# EAGLE board SparkFun_dToF-TMF8820-Panel (EAGLE 9.6.2), part 1 of 4
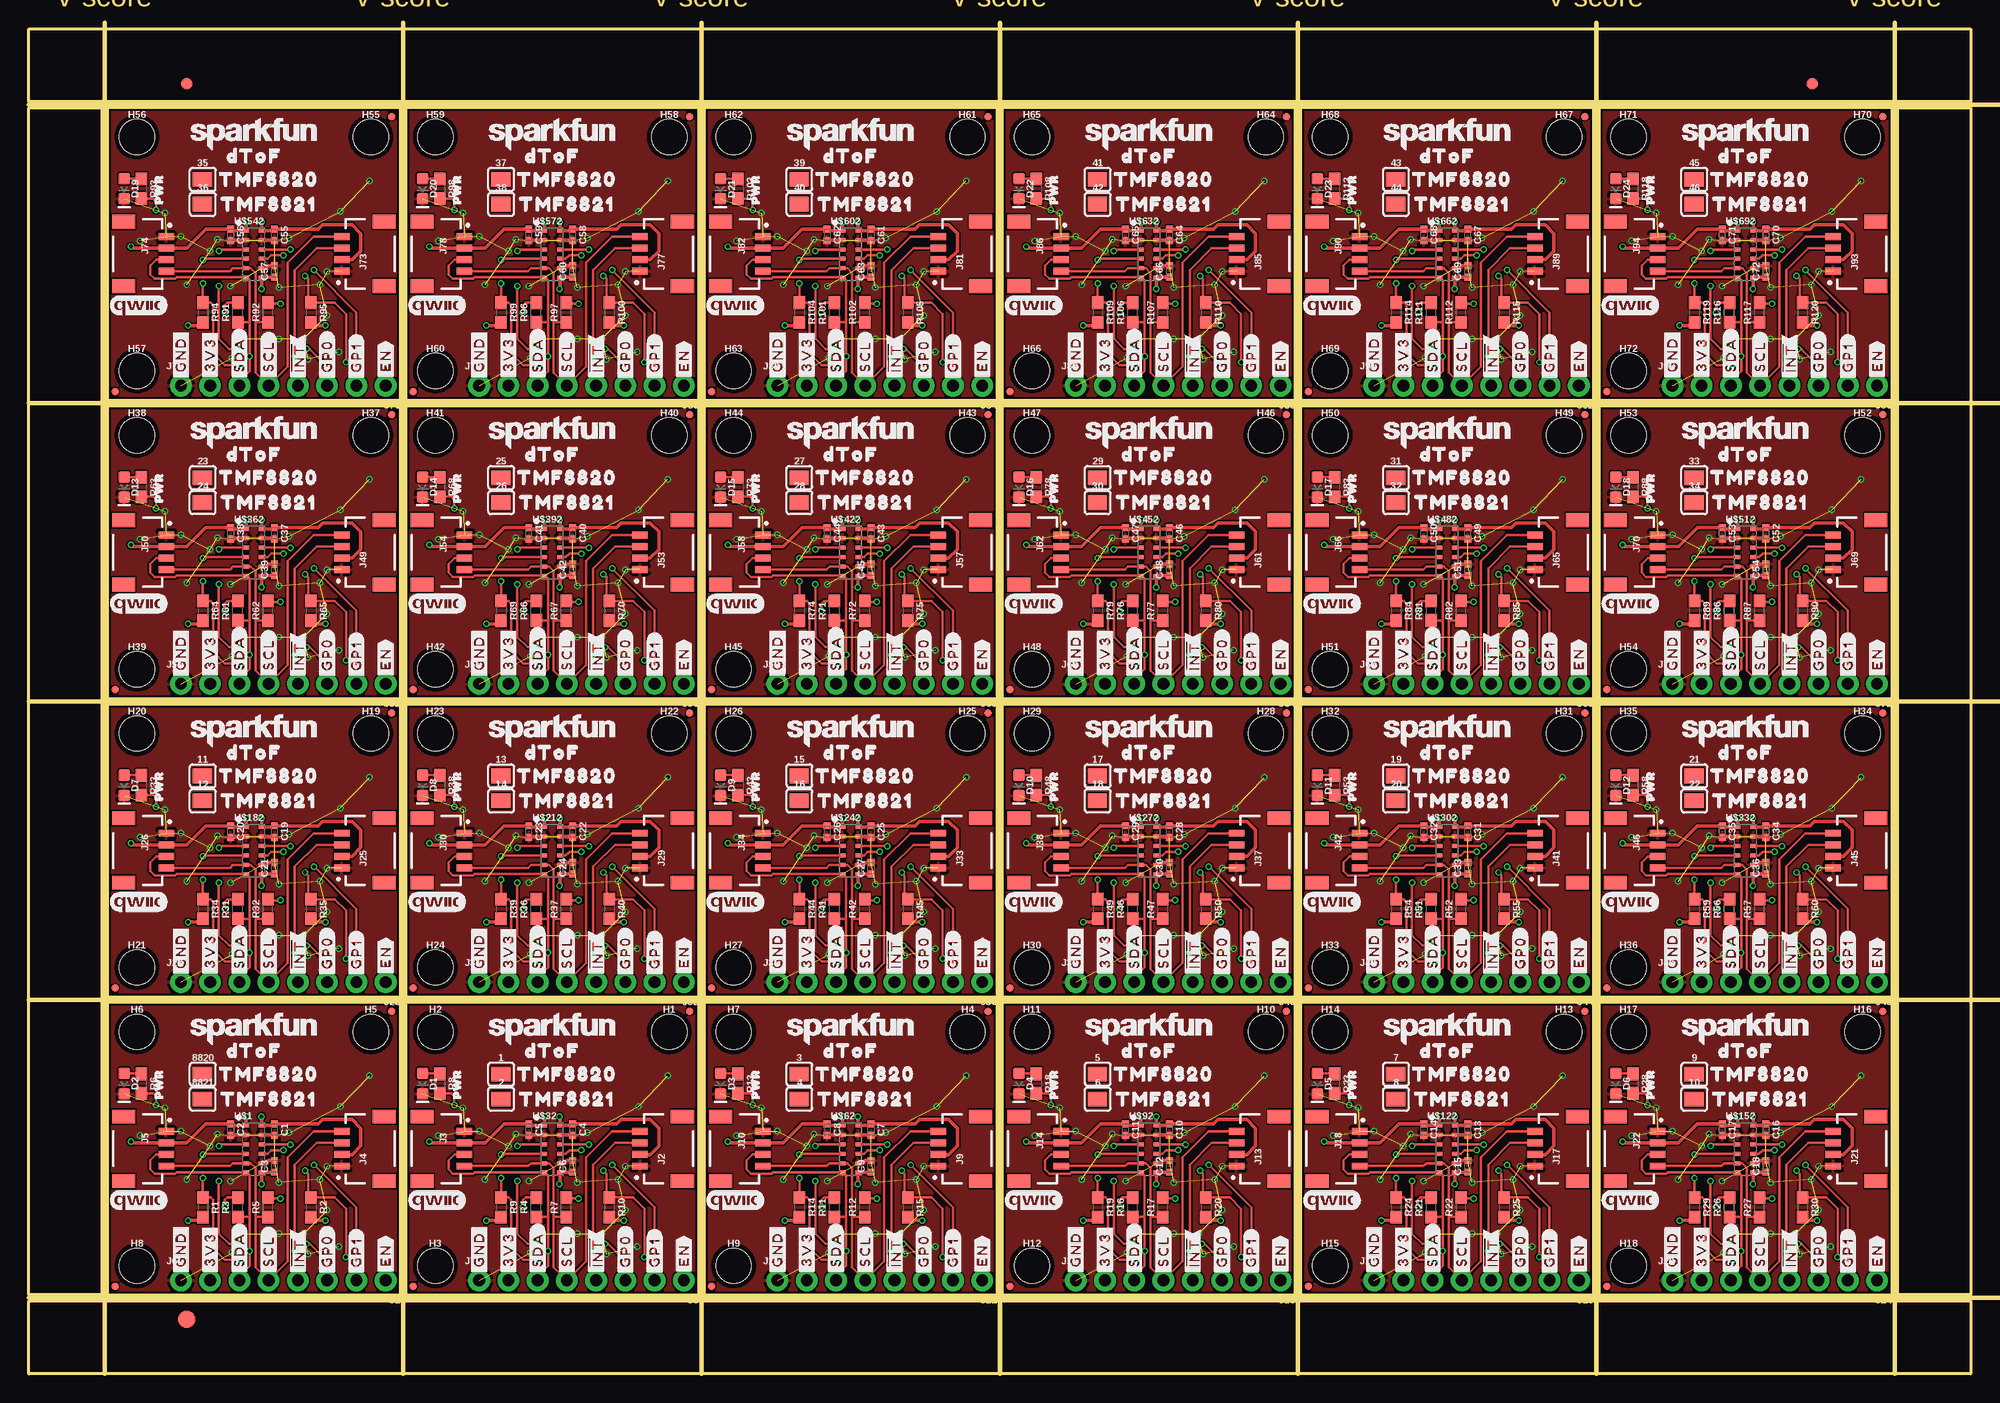
[diagram p0: board, top side]
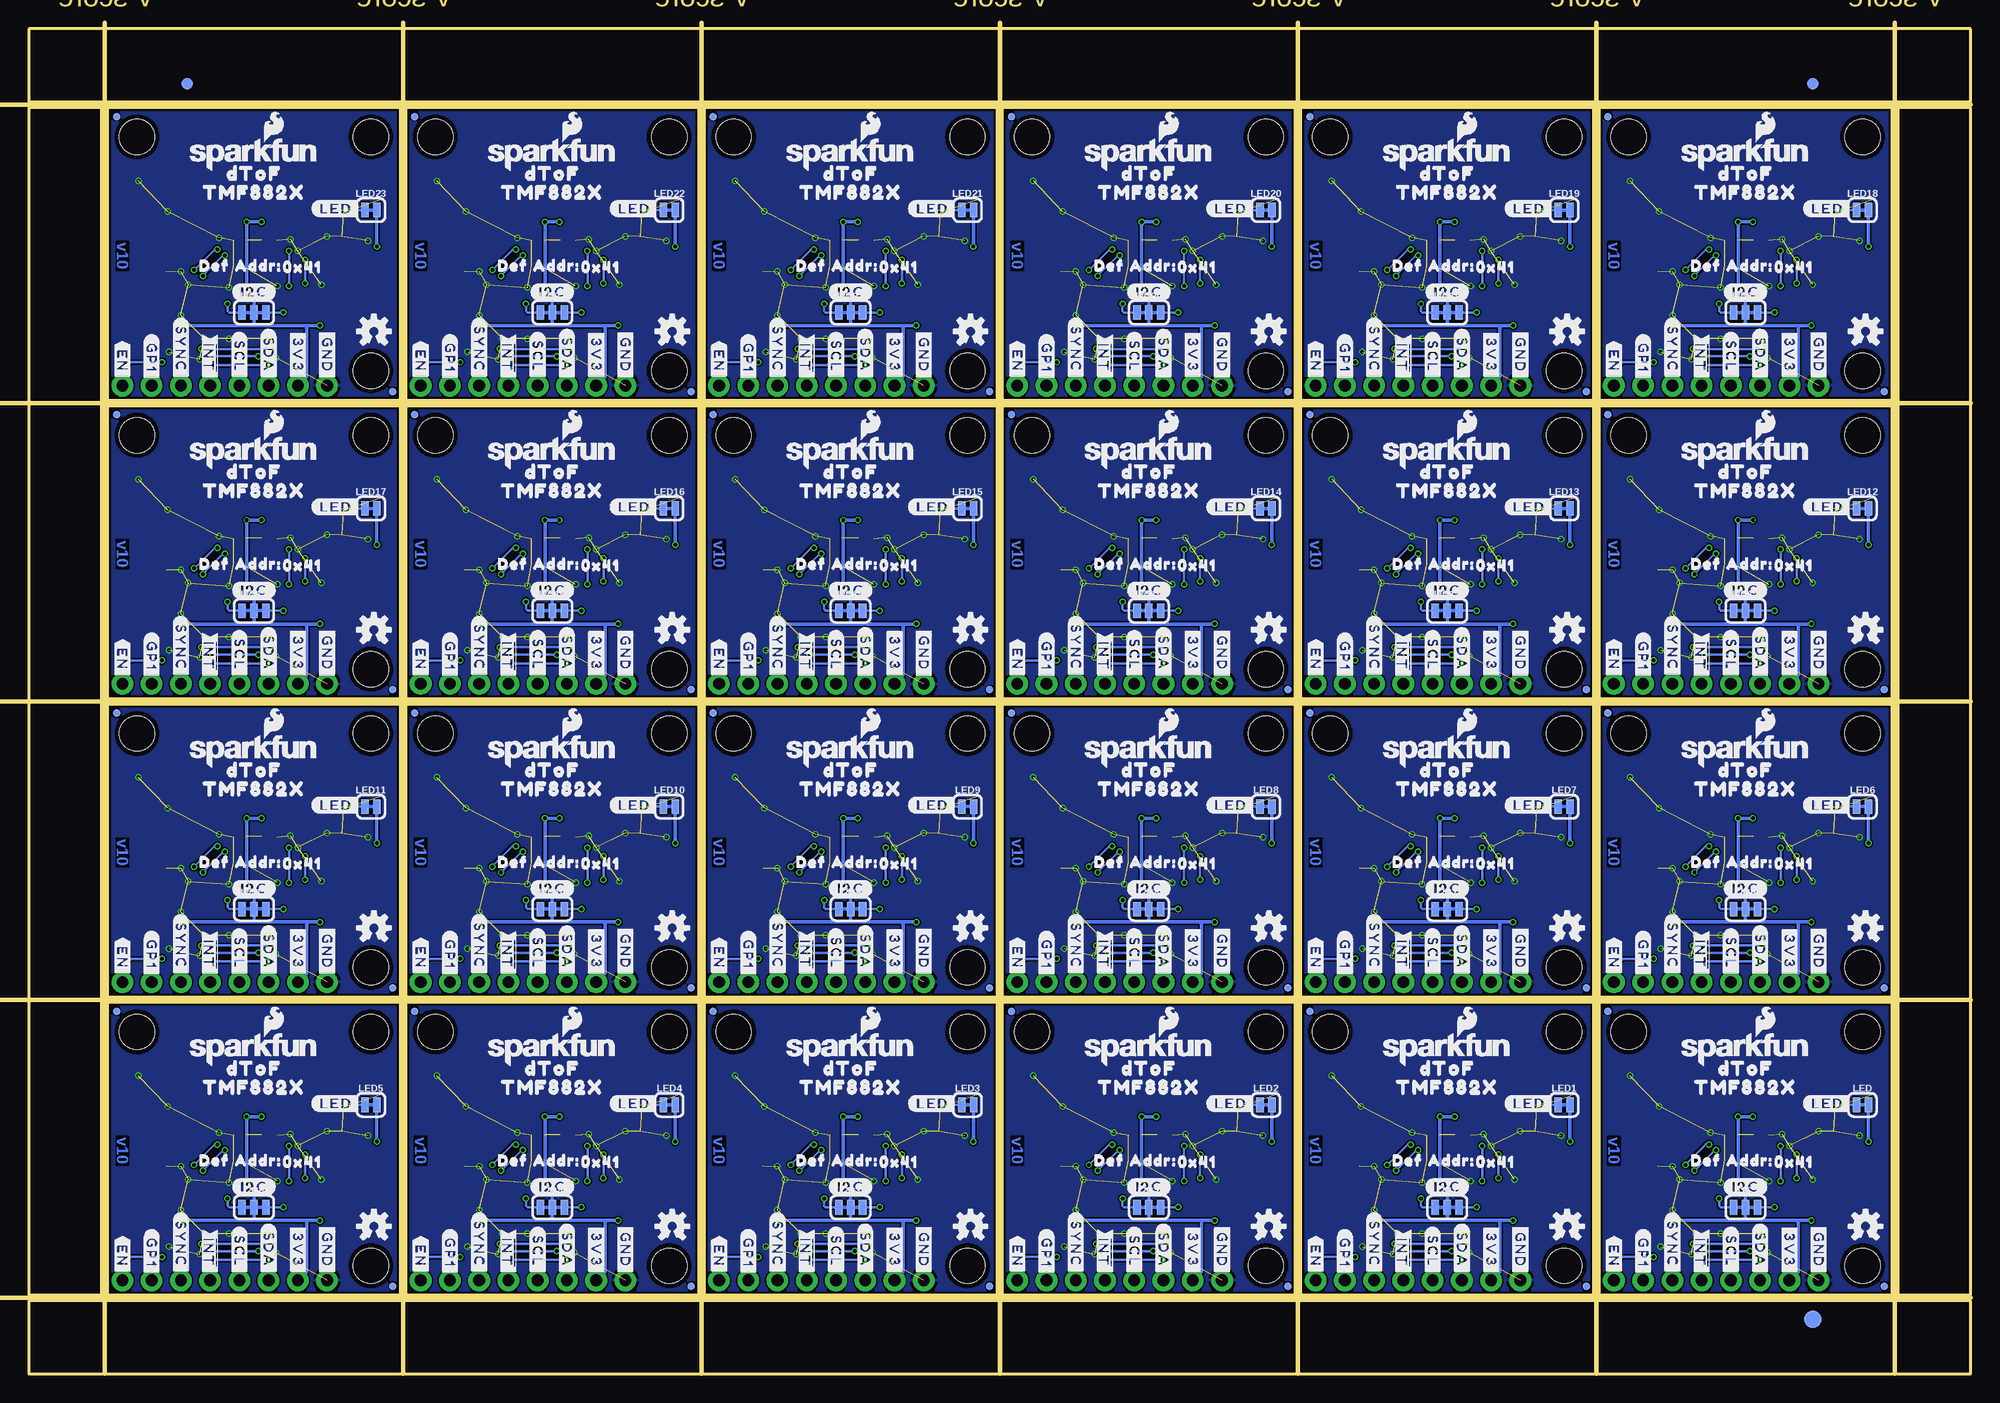
[diagram p1: board, bottom side, seen from below]

Size 168.66 x 116.84 mm. Coordinates in mm from the lower left corner, seen from the top.
Outline: 6.86,6.86 6.86,32.26 32.26,32.26 32.26,6.86 6.86,6.86
Outline: 32.77,6.86 32.77,32.26 58.17,32.26 58.17,6.86 32.77,6.86
Outline: 58.67,6.86 58.67,32.26 84.07,32.26 84.07,6.86 58.67,6.86
Outline: 84.58,6.86 84.58,32.26 109.98,32.26 109.98,6.86 84.58,6.86
Outline: 110.49,6.86 110.49,32.26 135.89,32.26 135.89,6.86 110.49,6.86
Outline: 136.4,6.86 136.4,32.26 161.8,32.26 161.8,6.86 136.4,6.86
Outline: 6.86,32.77 6.86,58.17 32.26,58.17 32.26,32.77 6.86,32.77
Outline: 32.77,32.77 32.77,58.17 58.17,58.17 58.17,32.77 32.77,32.77
Outline: 58.67,32.77 58.67,58.17 84.07,58.17 84.07,32.77 58.67,32.77
Outline: 84.58,32.77 84.58,58.17 109.98,58.17 109.98,32.77 84.58,32.77
Outline: 110.49,32.77 110.49,58.17 135.89,58.17 135.89,32.77 110.49,32.77
Outline: 136.4,32.77 136.4,58.17 161.8,58.17 161.8,32.77 136.4,32.77
Outline: 6.86,58.67 6.86,84.07 32.26,84.07 32.26,58.67 6.86,58.67
Outline: 32.77,58.67 32.77,84.07 58.17,84.07 58.17,58.67 32.77,58.67
Outline: 58.67,58.67 58.67,84.07 84.07,84.07 84.07,58.67 58.67,58.67
Outline: 84.58,58.67 84.58,84.07 109.98,84.07 109.98,58.67 84.58,58.67
Outline: 110.49,58.67 110.49,84.07 135.89,84.07 135.89,58.67 110.49,58.67
Outline: 136.4,58.67 136.4,84.07 161.8,84.07 161.8,58.67 136.4,58.67
Outline: 6.86,84.58 6.86,109.98 32.26,109.98 32.26,84.58 6.86,84.58
Outline: 32.77,84.58 32.77,109.98 58.17,109.98 58.17,84.58 32.77,84.58
Outline: 58.67,84.58 58.67,109.98 84.07,109.98 84.07,84.58 58.67,84.58
Outline: 84.58,84.58 84.58,109.98 109.98,109.98 109.98,84.58 84.58,84.58
Outline: 110.49,84.58 110.49,109.98 135.89,109.98 135.89,84.58 110.49,84.58
Outline: 136.4,84.58 136.4,109.98 161.8,109.98 161.8,84.58 136.4,84.58
Outline: 0,6.35 168.66,6.35 168.66,0 0,0 0,6.35
Outline: 162.31,109.98 168.66,109.98 168.66,6.86 162.31,6.86 162.31,109.98
Outline: 0,116.84 168.66,116.84 168.66,110.49 0,110.49 0,116.84
Outline: 0,109.98 6.35,109.98 6.35,6.86 0,6.86 0,109.98
Copper layers (1*16): Top 0.035mm / dielectric 1.5mm / Bottom 0.035mm
Design rules "SparkFun_tDof-TMF8820": minimum track width 5mil, minimum drill 0.3mm, track to track 5mil, track to pad 5mil, pad to pad 5mil, via to via 5mil, smd to smd 5mil, copper to edge 7mil, drill to drill 7mil, minimum pad ring 5mil, minimum via ring 5mil, stop-mask expansion 2.5mil, vias tented up to drill 25mil, thermal gap 10mil
Milling: 12 lines

## Footprints (pad centres in the part's own frame; a part is rotated, then mirrored left to right if it is on the bottom)
PRODUCT_IDENT_PASTE_SILK = smd 1.676 x 1.27: 1 -0.025,0
PRODUCT_IDENT_NO_SILK = smd 1.676 x 1.27: 1 -0.025,0
0402-TIGHT = smd 0.6 x 0.6: 1 -0.5,0; 2 0.5,0
LED-0603 = smd 1 x 1: A -0.877,0; C 0.877,0
FIDUCIAL-1X2 = smd 1 x 1: 1 0,0
FIDUCIAL-1.5X3 = smd 1.5 x 1.5: 1 0,0
FIDUCIAL-MICRO = smd 0.635 x 0.635: 1 0,0
STAND-OFF-TIGHT = hole 3.048: 0,0
SMT-JUMPER_3_2-NC_TRACE_SILK = smd 0.66 x 1.27: 1 -1.041,0; 2 0,0; 3 1.041,0
1X04_NO_SILK = drill 1.016 pad 1.88: 1 0,0; 2 2.54,0; 3 5.08,0; 4 7.62,0
JST04_1MM_RA = smd 0.6 x 1.35: 1 -1.5,0; 2 -0.5,0; 3 0.5,0; 4 1.5,0 | smd 1.2 x 2: NC1 2.8,-3.675; NC2 -2.8,-3.675
SMT-JUMPER_2_NC_TRACE_SILK = smd 0.66 x 1.27: 1 -0.521,0; 2 0.521,0
0603 = smd 1.1 x 1: 1 -0.85,0; 2 0.85,0
TMF882X = smd 0.5 x 0.35: P1 -0.686,2.032; P2 -0.686,1.212; P3 -0.686,0.392; P4 -0.686,-0.428; P5 -0.686,-1.248; P6 -0.686,-2.068; P7 0.664,-2.068; P8 0.664,-1.248; P9 0.664,-0.428; P10 0.664,0.392; P11 0.664,1.212; P12 0.664,2.032

## Placement (x,y rotation side)
1  PROD_ID_PASTE_SILK  [PRODUCT_IDENT_PASTE_SILK]  41.02,26.04 0 top
2  PROD_ID_NO-PASTE_SILK  [PRODUCT_IDENT_NO_SILK]  41.02,23.88 0 top
3  PROD_ID_PASTE_SILK  [PRODUCT_IDENT_PASTE_SILK]  66.93,26.04 0 top
4  PROD_ID_NO-PASTE_SILK  [PRODUCT_IDENT_NO_SILK]  66.93,23.88 0 top
5  PROD_ID_PASTE_SILK  [PRODUCT_IDENT_PASTE_SILK]  92.84,26.04 0 top
6  PROD_ID_NO-PASTE_SILK  [PRODUCT_IDENT_NO_SILK]  92.84,23.88 0 top
7  PROD_ID_PASTE_SILK  [PRODUCT_IDENT_PASTE_SILK]  118.75,26.04 0 top
8  PROD_ID_NO-PASTE_SILK  [PRODUCT_IDENT_NO_SILK]  118.75,23.88 0 top
9  PROD_ID_PASTE_SILK  [PRODUCT_IDENT_PASTE_SILK]  144.65,26.04 0 top
10  PROD_ID_NO-PASTE_SILK  [PRODUCT_IDENT_NO_SILK]  144.65,23.88 0 top
11  PROD_ID_PASTE_SILK  [PRODUCT_IDENT_PASTE_SILK]  15.11,51.94 0 top
12  PROD_ID_NO-PASTE_SILK  [PRODUCT_IDENT_NO_SILK]  15.11,49.78 0 top
13  PROD_ID_PASTE_SILK  [PRODUCT_IDENT_PASTE_SILK]  41.02,51.94 0 top
14  PROD_ID_NO-PASTE_SILK  [PRODUCT_IDENT_NO_SILK]  41.02,49.78 0 top
15  PROD_ID_PASTE_SILK  [PRODUCT_IDENT_PASTE_SILK]  66.93,51.94 0 top
16  PROD_ID_NO-PASTE_SILK  [PRODUCT_IDENT_NO_SILK]  66.93,49.78 0 top
17  PROD_ID_PASTE_SILK  [PRODUCT_IDENT_PASTE_SILK]  92.84,51.94 0 top
18  PROD_ID_NO-PASTE_SILK  [PRODUCT_IDENT_NO_SILK]  92.84,49.78 0 top
19  PROD_ID_PASTE_SILK  [PRODUCT_IDENT_PASTE_SILK]  118.75,51.94 0 top
20  PROD_ID_NO-PASTE_SILK  [PRODUCT_IDENT_NO_SILK]  118.75,49.78 0 top
21  PROD_ID_PASTE_SILK  [PRODUCT_IDENT_PASTE_SILK]  144.65,51.94 0 top
22  PROD_ID_NO-PASTE_SILK  [PRODUCT_IDENT_NO_SILK]  144.65,49.78 0 top
23  PROD_ID_PASTE_SILK  [PRODUCT_IDENT_PASTE_SILK]  15.11,77.85 0 top
24  PROD_ID_NO-PASTE_SILK  [PRODUCT_IDENT_NO_SILK]  15.11,75.69 0 top
25  PROD_ID_PASTE_SILK  [PRODUCT_IDENT_PASTE_SILK]  41.02,77.85 0 top
26  PROD_ID_NO-PASTE_SILK  [PRODUCT_IDENT_NO_SILK]  41.02,75.69 0 top
27  PROD_ID_PASTE_SILK  [PRODUCT_IDENT_PASTE_SILK]  66.93,77.85 0 top
28  PROD_ID_NO-PASTE_SILK  [PRODUCT_IDENT_NO_SILK]  66.93,75.69 0 top
29  PROD_ID_PASTE_SILK  [PRODUCT_IDENT_PASTE_SILK]  92.84,77.85 0 top
30  PROD_ID_NO-PASTE_SILK  [PRODUCT_IDENT_NO_SILK]  92.84,75.69 0 top
31  PROD_ID_PASTE_SILK  [PRODUCT_IDENT_PASTE_SILK]  118.75,77.85 0 top
32  PROD_ID_NO-PASTE_SILK  [PRODUCT_IDENT_NO_SILK]  118.75,75.69 0 top
33  PROD_ID_PASTE_SILK  [PRODUCT_IDENT_PASTE_SILK]  144.65,77.85 0 top
34  PROD_ID_NO-PASTE_SILK  [PRODUCT_IDENT_NO_SILK]  144.65,75.69 0 top
35  PROD_ID_PASTE_SILK  [PRODUCT_IDENT_PASTE_SILK]  15.11,103.76 0 top
36  PROD_ID_NO-PASTE_SILK  [PRODUCT_IDENT_NO_SILK]  15.11,101.6 0 top
37  PROD_ID_PASTE_SILK  [PRODUCT_IDENT_PASTE_SILK]  41.02,103.76 0 top
38  PROD_ID_NO-PASTE_SILK  [PRODUCT_IDENT_NO_SILK]  41.02,101.6 0 top
39  PROD_ID_PASTE_SILK  [PRODUCT_IDENT_PASTE_SILK]  66.93,103.76 0 top
40  PROD_ID_NO-PASTE_SILK  [PRODUCT_IDENT_NO_SILK]  66.93,101.6 0 top
41  PROD_ID_PASTE_SILK  [PRODUCT_IDENT_PASTE_SILK]  92.84,103.76 0 top
42  PROD_ID_NO-PASTE_SILK  [PRODUCT_IDENT_NO_SILK]  92.84,101.6 0 top
43  PROD_ID_PASTE_SILK  [PRODUCT_IDENT_PASTE_SILK]  118.75,103.76 0 top
44  PROD_ID_NO-PASTE_SILK  [PRODUCT_IDENT_NO_SILK]  118.75,101.6 0 top
45  PROD_ID_PASTE_SILK  [PRODUCT_IDENT_PASTE_SILK]  144.65,103.76 0 top
46  PROD_ID_NO-PASTE_SILK  [PRODUCT_IDENT_NO_SILK]  144.65,101.6 0 top
8820  PROD_ID_PASTE_SILK  [PRODUCT_IDENT_PASTE_SILK]  15.11,26.04 0 top
8821  PROD_ID_NO-PASTE_SILK  [PRODUCT_IDENT_NO_SILK]  15.11,23.88 0 top
C1  0.1uF  [0402-TIGHT]  21.34,21.21 270 top
C2  0.1uF  [0402-TIGHT]  17.53,21.21 270 top
C3  0.1uF  [0402-TIGHT]  21.34,18.03 90 top
C4  0.1uF  [0402-TIGHT]  47.24,21.21 270 top
C5  0.1uF  [0402-TIGHT]  43.43,21.21 270 top
C6  0.1uF  [0402-TIGHT]  47.24,18.03 90 top
C7  0.1uF  [0402-TIGHT]  73.15,21.21 270 top
C8  0.1uF  [0402-TIGHT]  69.34,21.21 270 top
C9  0.1uF  [0402-TIGHT]  73.15,18.03 90 top
C10  0.1uF  [0402-TIGHT]  99.06,21.21 270 top
C11  0.1uF  [0402-TIGHT]  95.25,21.21 270 top
C12  0.1uF  [0402-TIGHT]  99.06,18.03 90 top
C13  0.1uF  [0402-TIGHT]  124.97,21.21 270 top
C14  0.1uF  [0402-TIGHT]  121.16,21.21 270 top
C15  0.1uF  [0402-TIGHT]  124.97,18.03 90 top
C16  0.1uF  [0402-TIGHT]  150.88,21.21 270 top
C17  0.1uF  [0402-TIGHT]  147.07,21.21 270 top
C18  0.1uF  [0402-TIGHT]  150.88,18.03 90 top
C19  0.1uF  [0402-TIGHT]  21.34,47.12 270 top
C20  0.1uF  [0402-TIGHT]  17.53,47.12 270 top
C21  0.1uF  [0402-TIGHT]  21.34,43.94 90 top
C22  0.1uF  [0402-TIGHT]  47.24,47.12 270 top
C23  0.1uF  [0402-TIGHT]  43.43,47.12 270 top
C24  0.1uF  [0402-TIGHT]  47.24,43.94 90 top
C25  0.1uF  [0402-TIGHT]  73.15,47.12 270 top
C26  0.1uF  [0402-TIGHT]  69.34,47.12 270 top
C27  0.1uF  [0402-TIGHT]  73.15,43.94 90 top
C28  0.1uF  [0402-TIGHT]  99.06,47.12 270 top
C29  0.1uF  [0402-TIGHT]  95.25,47.12 270 top
C30  0.1uF  [0402-TIGHT]  99.06,43.94 90 top
C31  0.1uF  [0402-TIGHT]  124.97,47.12 270 top
C32  0.1uF  [0402-TIGHT]  121.16,47.12 270 top
C33  0.1uF  [0402-TIGHT]  124.97,43.94 90 top
C34  0.1uF  [0402-TIGHT]  150.88,47.12 270 top
C35  0.1uF  [0402-TIGHT]  147.07,47.12 270 top
C36  0.1uF  [0402-TIGHT]  150.88,43.94 90 top
C37  0.1uF  [0402-TIGHT]  21.34,73.03 270 top
C38  0.1uF  [0402-TIGHT]  17.53,73.03 270 top
C39  0.1uF  [0402-TIGHT]  21.34,69.85 90 top
C40  0.1uF  [0402-TIGHT]  47.24,73.03 270 top
C41  0.1uF  [0402-TIGHT]  43.43,73.03 270 top
C42  0.1uF  [0402-TIGHT]  47.24,69.85 90 top
C43  0.1uF  [0402-TIGHT]  73.15,73.03 270 top
C44  0.1uF  [0402-TIGHT]  69.34,73.03 270 top
C45  0.1uF  [0402-TIGHT]  73.15,69.85 90 top
C46  0.1uF  [0402-TIGHT]  99.06,73.03 270 top
C47  0.1uF  [0402-TIGHT]  95.25,73.03 270 top
C48  0.1uF  [0402-TIGHT]  99.06,69.85 90 top
C49  0.1uF  [0402-TIGHT]  124.97,73.03 270 top
C50  0.1uF  [0402-TIGHT]  121.16,73.03 270 top
C51  0.1uF  [0402-TIGHT]  124.97,69.85 90 top
C52  0.1uF  [0402-TIGHT]  150.88,73.03 270 top
C53  0.1uF  [0402-TIGHT]  147.07,73.03 270 top
C54  0.1uF  [0402-TIGHT]  150.88,69.85 90 top
C55  0.1uF  [0402-TIGHT]  21.34,98.93 270 top
C56  0.1uF  [0402-TIGHT]  17.53,98.93 270 top
C57  0.1uF  [0402-TIGHT]  21.34,95.76 90 top
C58  0.1uF  [0402-TIGHT]  47.24,98.93 270 top
C59  0.1uF  [0402-TIGHT]  43.43,98.93 270 top
C60  0.1uF  [0402-TIGHT]  47.24,95.76 90 top
C61  0.1uF  [0402-TIGHT]  73.15,98.93 270 top
C62  0.1uF  [0402-TIGHT]  69.34,98.93 270 top
C63  0.1uF  [0402-TIGHT]  73.15,95.76 90 top
C64  0.1uF  [0402-TIGHT]  99.06,98.93 270 top
C65  0.1uF  [0402-TIGHT]  95.25,98.93 270 top
C66  0.1uF  [0402-TIGHT]  99.06,95.76 90 top
C67  0.1uF  [0402-TIGHT]  124.97,98.93 270 top
C68  0.1uF  [0402-TIGHT]  121.16,98.93 270 top
C69  0.1uF  [0402-TIGHT]  124.97,95.76 90 top
C70  0.1uF  [0402-TIGHT]  150.88,98.93 270 top
C71  0.1uF  [0402-TIGHT]  147.07,98.93 270 top
C72  0.1uF  [0402-TIGHT]  150.88,95.76 90 top
D1  RED  [LED-0603]  34.19,25.22 270 top
D2  RED  [LED-0603]  8.28,25.22 270 top
D3  RED  [LED-0603]  60.1,25.22 270 top
D4  RED  [LED-0603]  86,25.22 270 top
D5  RED  [LED-0603]  111.91,25.22 270 top
D6  RED  [LED-0603]  137.82,25.22 270 top
D7  RED  [LED-0603]  8.28,51.13 270 top
D8  RED  [LED-0603]  34.19,51.13 270 top
D9  RED  [LED-0603]  60.1,51.13 270 top
D10  RED  [LED-0603]  86,51.13 270 top
D11  RED  [LED-0603]  111.91,51.13 270 top
D12  RED  [LED-0603]  137.82,51.13 270 top
D13  RED  [LED-0603]  8.28,77.04 270 top
D14  RED  [LED-0603]  34.19,77.04 270 top
D15  RED  [LED-0603]  60.1,77.04 270 top
D16  RED  [LED-0603]  86,77.04 270 top
D17  RED  [LED-0603]  111.91,77.04 270 top
D18  RED  [LED-0603]  137.82,77.04 270 top
D19  RED  [LED-0603]  8.28,102.95 270 top
D20  RED  [LED-0603]  34.19,102.95 270 top
D21  RED  [LED-0603]  60.1,102.95 270 top
D22  RED  [LED-0603]  86,102.95 270 top
D23  RED  [LED-0603]  111.91,102.95 270 top
D24  RED  [LED-0603]  137.82,102.95 270 top
E$1  [FIDUCIAL-1X2]  13.72,112.08 0 top
E$2  [FIDUCIAL-1X2]  13.72,112.08 0 bottom
E$3  [FIDUCIAL-1X2]  154.88,112.08 0 top
E$4  [FIDUCIAL-1X2]  154.88,112.08 0 bottom
E$5  [FIDUCIAL-1.5X3]  13.72,4.76 0 top
E$6  [FIDUCIAL-1.5X3]  13.72,4.76 0 bottom
FD1  FIDUCIALUFIDUCIAL  [FIDUCIAL-MICRO]  33.4,7.62 0 bottom
FD2  FIDUCIALUFIDUCIAL  [FIDUCIAL-MICRO]  57.4,31.5 0 bottom
FD3  FIDUCIALUFIDUCIAL  [FIDUCIAL-MICRO]  57.4,31.5 0 top
FD4  FIDUCIALUFIDUCIAL  [FIDUCIAL-MICRO]  33.4,7.62 0 top
FD5  FIDUCIALUFIDUCIAL  [FIDUCIAL-MICRO]  7.49,7.62 0 bottom
FD6  FIDUCIALUFIDUCIAL  [FIDUCIAL-MICRO]  31.5,31.5 0 bottom
FD7  FIDUCIALUFIDUCIAL  [FIDUCIAL-MICRO]  31.5,31.5 0 top
FD8  FIDUCIALUFIDUCIAL  [FIDUCIAL-MICRO]  7.49,7.62 0 top
FD9  FIDUCIALUFIDUCIAL  [FIDUCIAL-MICRO]  59.31,7.62 0 bottom
FD10  FIDUCIALUFIDUCIAL  [FIDUCIAL-MICRO]  83.31,31.5 0 bottom
FD11  FIDUCIALUFIDUCIAL  [FIDUCIAL-MICRO]  83.31,31.5 0 top
FD12  FIDUCIALUFIDUCIAL  [FIDUCIAL-MICRO]  59.31,7.62 0 top
FD13  FIDUCIALUFIDUCIAL  [FIDUCIAL-MICRO]  85.22,7.62 0 bottom
FD14  FIDUCIALUFIDUCIAL  [FIDUCIAL-MICRO]  109.22,31.5 0 bottom
FD15  FIDUCIALUFIDUCIAL  [FIDUCIAL-MICRO]  109.22,31.5 0 top
FD16  FIDUCIALUFIDUCIAL  [FIDUCIAL-MICRO]  85.22,7.62 0 top
FD17  FIDUCIALUFIDUCIAL  [FIDUCIAL-MICRO]  111.12,7.62 0 bottom
FD18  FIDUCIALUFIDUCIAL  [FIDUCIAL-MICRO]  135.13,31.5 0 bottom
FD19  FIDUCIALUFIDUCIAL  [FIDUCIAL-MICRO]  135.13,31.5 0 top
FD20  FIDUCIALUFIDUCIAL  [FIDUCIAL-MICRO]  111.12,7.62 0 top
FD21  FIDUCIALUFIDUCIAL  [FIDUCIAL-MICRO]  137.03,7.62 0 bottom
FD22  FIDUCIALUFIDUCIAL  [FIDUCIAL-MICRO]  161.04,31.5 0 bottom
FD23  FIDUCIALUFIDUCIAL  [FIDUCIAL-MICRO]  161.04,31.5 0 top
FD24  FIDUCIALUFIDUCIAL  [FIDUCIAL-MICRO]  137.03,7.62 0 top
FD25  FIDUCIALUFIDUCIAL  [FIDUCIAL-MICRO]  7.49,33.53 0 bottom
FD26  FIDUCIALUFIDUCIAL  [FIDUCIAL-MICRO]  31.5,57.4 0 bottom
FD27  FIDUCIALUFIDUCIAL  [FIDUCIAL-MICRO]  31.5,57.4 0 top
FD28  FIDUCIALUFIDUCIAL  [FIDUCIAL-MICRO]  7.49,33.53 0 top
FD29  FIDUCIALUFIDUCIAL  [FIDUCIAL-MICRO]  33.4,33.53 0 bottom
FD30  FIDUCIALUFIDUCIAL  [FIDUCIAL-MICRO]  57.4,57.4 0 bottom
FD31  FIDUCIALUFIDUCIAL  [FIDUCIAL-MICRO]  57.4,57.4 0 top
FD32  FIDUCIALUFIDUCIAL  [FIDUCIAL-MICRO]  33.4,33.53 0 top
FD33  FIDUCIALUFIDUCIAL  [FIDUCIAL-MICRO]  59.31,33.53 0 bottom
FD34  FIDUCIALUFIDUCIAL  [FIDUCIAL-MICRO]  83.31,57.4 0 bottom
FD35  FIDUCIALUFIDUCIAL  [FIDUCIAL-MICRO]  83.31,57.4 0 top
FD36  FIDUCIALUFIDUCIAL  [FIDUCIAL-MICRO]  59.31,33.53 0 top
FD37  FIDUCIALUFIDUCIAL  [FIDUCIAL-MICRO]  85.22,33.53 0 bottom
FD38  FIDUCIALUFIDUCIAL  [FIDUCIAL-MICRO]  109.22,57.4 0 bottom
FD39  FIDUCIALUFIDUCIAL  [FIDUCIAL-MICRO]  109.22,57.4 0 top
FD40  FIDUCIALUFIDUCIAL  [FIDUCIAL-MICRO]  85.22,33.53 0 top
FD41  FIDUCIALUFIDUCIAL  [FIDUCIAL-MICRO]  111.12,33.53 0 bottom
FD42  FIDUCIALUFIDUCIAL  [FIDUCIAL-MICRO]  135.13,57.4 0 bottom
FD43  FIDUCIALUFIDUCIAL  [FIDUCIAL-MICRO]  135.13,57.4 0 top
FD44  FIDUCIALUFIDUCIAL  [FIDUCIAL-MICRO]  111.12,33.53 0 top
FD45  FIDUCIALUFIDUCIAL  [FIDUCIAL-MICRO]  137.03,33.53 0 bottom
FD46  FIDUCIALUFIDUCIAL  [FIDUCIAL-MICRO]  161.04,57.4 0 bottom
FD47  FIDUCIALUFIDUCIAL  [FIDUCIAL-MICRO]  161.04,57.4 0 top
FD48  FIDUCIALUFIDUCIAL  [FIDUCIAL-MICRO]  137.03,33.53 0 top
FD49  FIDUCIALUFIDUCIAL  [FIDUCIAL-MICRO]  7.49,59.44 0 bottom
FD50  FIDUCIALUFIDUCIAL  [FIDUCIAL-MICRO]  31.5,83.31 0 bottom
FD51  FIDUCIALUFIDUCIAL  [FIDUCIAL-MICRO]  31.5,83.31 0 top
FD52  FIDUCIALUFIDUCIAL  [FIDUCIAL-MICRO]  7.49,59.44 0 top
FD53  FIDUCIALUFIDUCIAL  [FIDUCIAL-MICRO]  33.4,59.44 0 bottom
FD54  FIDUCIALUFIDUCIAL  [FIDUCIAL-MICRO]  57.4,83.31 0 bottom
FD55  FIDUCIALUFIDUCIAL  [FIDUCIAL-MICRO]  57.4,83.31 0 top
FD56  FIDUCIALUFIDUCIAL  [FIDUCIAL-MICRO]  33.4,59.44 0 top
FD57  FIDUCIALUFIDUCIAL  [FIDUCIAL-MICRO]  59.31,59.44 0 bottom
FD58  FIDUCIALUFIDUCIAL  [FIDUCIAL-MICRO]  83.31,83.31 0 bottom
FD59  FIDUCIALUFIDUCIAL  [FIDUCIAL-MICRO]  83.31,83.31 0 top
FD60  FIDUCIALUFIDUCIAL  [FIDUCIAL-MICRO]  59.31,59.44 0 top
FD61  FIDUCIALUFIDUCIAL  [FIDUCIAL-MICRO]  85.22,59.44 0 bottom
FD62  FIDUCIALUFIDUCIAL  [FIDUCIAL-MICRO]  109.22,83.31 0 bottom
FD63  FIDUCIALUFIDUCIAL  [FIDUCIAL-MICRO]  109.22,83.31 0 top
FD64  FIDUCIALUFIDUCIAL  [FIDUCIAL-MICRO]  85.22,59.44 0 top
FD65  FIDUCIALUFIDUCIAL  [FIDUCIAL-MICRO]  111.12,59.44 0 bottom
FD66  FIDUCIALUFIDUCIAL  [FIDUCIAL-MICRO]  135.13,83.31 0 bottom
FD67  FIDUCIALUFIDUCIAL  [FIDUCIAL-MICRO]  135.13,83.31 0 top
FD68  FIDUCIALUFIDUCIAL  [FIDUCIAL-MICRO]  111.12,59.44 0 top
FD69  FIDUCIALUFIDUCIAL  [FIDUCIAL-MICRO]  137.03,59.44 0 bottom
FD70  FIDUCIALUFIDUCIAL  [FIDUCIAL-MICRO]  161.04,83.31 0 bottom
FD71  FIDUCIALUFIDUCIAL  [FIDUCIAL-MICRO]  161.04,83.31 0 top
FD72  FIDUCIALUFIDUCIAL  [FIDUCIAL-MICRO]  137.03,59.44 0 top
FD73  FIDUCIALUFIDUCIAL  [FIDUCIAL-MICRO]  7.49,85.34 0 bottom
FD74  FIDUCIALUFIDUCIAL  [FIDUCIAL-MICRO]  31.5,109.22 0 bottom
FD75  FIDUCIALUFIDUCIAL  [FIDUCIAL-MICRO]  31.5,109.22 0 top
FD76  FIDUCIALUFIDUCIAL  [FIDUCIAL-MICRO]  7.49,85.34 0 top
FD77  FIDUCIALUFIDUCIAL  [FIDUCIAL-MICRO]  33.4,85.34 0 bottom
FD78  FIDUCIALUFIDUCIAL  [FIDUCIAL-MICRO]  57.4,109.22 0 bottom
FD79  FIDUCIALUFIDUCIAL  [FIDUCIAL-MICRO]  57.4,109.22 0 top
FD80  FIDUCIALUFIDUCIAL  [FIDUCIAL-MICRO]  33.4,85.34 0 top
FD81  FIDUCIALUFIDUCIAL  [FIDUCIAL-MICRO]  59.31,85.34 0 bottom
FD82  FIDUCIALUFIDUCIAL  [FIDUCIAL-MICRO]  83.31,109.22 0 bottom
FD83  FIDUCIALUFIDUCIAL  [FIDUCIAL-MICRO]  83.31,109.22 0 top
FD84  FIDUCIALUFIDUCIAL  [FIDUCIAL-MICRO]  59.31,85.34 0 top
FD85  FIDUCIALUFIDUCIAL  [FIDUCIAL-MICRO]  85.22,85.34 0 bottom
FD86  FIDUCIALUFIDUCIAL  [FIDUCIAL-MICRO]  109.22,109.22 0 bottom
FD87  FIDUCIALUFIDUCIAL  [FIDUCIAL-MICRO]  109.22,109.22 0 top
FD88  FIDUCIALUFIDUCIAL  [FIDUCIAL-MICRO]  85.22,85.34 0 top
FD89  FIDUCIALUFIDUCIAL  [FIDUCIAL-MICRO]  111.12,85.34 0 bottom
FD90  FIDUCIALUFIDUCIAL  [FIDUCIAL-MICRO]  135.13,109.22 0 bottom
FD91  FIDUCIALUFIDUCIAL  [FIDUCIAL-MICRO]  135.13,109.22 0 top
FD92  FIDUCIALUFIDUCIAL  [FIDUCIAL-MICRO]  111.12,85.34 0 top
FD93  FIDUCIALUFIDUCIAL  [FIDUCIAL-MICRO]  137.03,85.34 0 bottom
FD94  FIDUCIALUFIDUCIAL  [FIDUCIAL-MICRO]  161.04,109.22 0 bottom
FD95  FIDUCIALUFIDUCIAL  [FIDUCIAL-MICRO]  161.04,109.22 0 top
FD96  FIDUCIALUFIDUCIAL  [FIDUCIAL-MICRO]  137.03,85.34 0 top
H1  STAND-OFFTIGHT  [STAND-OFF-TIGHT]  55.63,29.72 0 top
H2  STAND-OFFTIGHT  [STAND-OFF-TIGHT]  35.31,29.72 0 top
H3  STAND-OFFTIGHT  [STAND-OFF-TIGHT]  35.31,9.4 0 top
H4  STAND-OFFTIGHT  [STAND-OFF-TIGHT]  81.53,29.72 0 top
H5  STAND-OFFTIGHT  [STAND-OFF-TIGHT]  29.72,29.72 0 top
H6  STAND-OFFTIGHT  [STAND-OFF-TIGHT]  9.4,29.72 0 top
H7  STAND-OFFTIGHT  [STAND-OFF-TIGHT]  61.21,29.72 0 top
H8  STAND-OFFTIGHT  [STAND-OFF-TIGHT]  9.4,9.4 0 top
H9  STAND-OFFTIGHT  [STAND-OFF-TIGHT]  61.21,9.4 0 top
H10  STAND-OFFTIGHT  [STAND-OFF-TIGHT]  107.44,29.72 0 top
H11  STAND-OFFTIGHT  [STAND-OFF-TIGHT]  87.12,29.72 0 top
H12  STAND-OFFTIGHT  [STAND-OFF-TIGHT]  87.12,9.4 0 top
H13  STAND-OFFTIGHT  [STAND-OFF-TIGHT]  133.35,29.72 0 top
H14  STAND-OFFTIGHT  [STAND-OFF-TIGHT]  113.03,29.72 0 top
H15  STAND-OFFTIGHT  [STAND-OFF-TIGHT]  113.03,9.4 0 top
H16  STAND-OFFTIGHT  [STAND-OFF-TIGHT]  159.26,29.72 0 top
H17  STAND-OFFTIGHT  [STAND-OFF-TIGHT]  138.94,29.72 0 top
H18  STAND-OFFTIGHT  [STAND-OFF-TIGHT]  138.94,9.4 0 top
H19  STAND-OFFTIGHT  [STAND-OFF-TIGHT]  29.72,55.63 0 top
H20  STAND-OFFTIGHT  [STAND-OFF-TIGHT]  9.4,55.63 0 top
H21  STAND-OFFTIGHT  [STAND-OFF-TIGHT]  9.4,35.31 0 top
H22  STAND-OFFTIGHT  [STAND-OFF-TIGHT]  55.63,55.63 0 top
H23  STAND-OFFTIGHT  [STAND-OFF-TIGHT]  35.31,55.63 0 top
H24  STAND-OFFTIGHT  [STAND-OFF-TIGHT]  35.31,35.31 0 top
H25  STAND-OFFTIGHT  [STAND-OFF-TIGHT]  81.53,55.63 0 top
H26  STAND-OFFTIGHT  [STAND-OFF-TIGHT]  61.21,55.63 0 top
H27  STAND-OFFTIGHT  [STAND-OFF-TIGHT]  61.21,35.31 0 top
H28  STAND-OFFTIGHT  [STAND-OFF-TIGHT]  107.44,55.63 0 top
H29  STAND-OFFTIGHT  [STAND-OFF-TIGHT]  87.12,55.63 0 top
H30  STAND-OFFTIGHT  [STAND-OFF-TIGHT]  87.12,35.31 0 top
H31  STAND-OFFTIGHT  [STAND-OFF-TIGHT]  133.35,55.63 0 top
H32  STAND-OFFTIGHT  [STAND-OFF-TIGHT]  113.03,55.63 0 top
H33  STAND-OFFTIGHT  [STAND-OFF-TIGHT]  113.03,35.31 0 top
H34  STAND-OFFTIGHT  [STAND-OFF-TIGHT]  159.26,55.63 0 top
H35  STAND-OFFTIGHT  [STAND-OFF-TIGHT]  138.94,55.63 0 top
H36  STAND-OFFTIGHT  [STAND-OFF-TIGHT]  138.94,35.31 0 top
H37  STAND-OFFTIGHT  [STAND-OFF-TIGHT]  29.72,81.53 0 top
H38  STAND-OFFTIGHT  [STAND-OFF-TIGHT]  9.4,81.53 0 top
H39  STAND-OFFTIGHT  [STAND-OFF-TIGHT]  9.4,61.21 0 top
H40  STAND-OFFTIGHT  [STAND-OFF-TIGHT]  55.63,81.53 0 top
H41  STAND-OFFTIGHT  [STAND-OFF-TIGHT]  35.31,81.53 0 top
H42  STAND-OFFTIGHT  [STAND-OFF-TIGHT]  35.31,61.21 0 top
H43  STAND-OFFTIGHT  [STAND-OFF-TIGHT]  81.53,81.53 0 top
H44  STAND-OFFTIGHT  [STAND-OFF-TIGHT]  61.21,81.53 0 top
H45  STAND-OFFTIGHT  [STAND-OFF-TIGHT]  61.21,61.21 0 top
H46  STAND-OFFTIGHT  [STAND-OFF-TIGHT]  107.44,81.53 0 top
H47  STAND-OFFTIGHT  [STAND-OFF-TIGHT]  87.12,81.53 0 top
H48  STAND-OFFTIGHT  [STAND-OFF-TIGHT]  87.12,61.21 0 top
H49  STAND-OFFTIGHT  [STAND-OFF-TIGHT]  133.35,81.53 0 top
H50  STAND-OFFTIGHT  [STAND-OFF-TIGHT]  113.03,81.53 0 top
H51  STAND-OFFTIGHT  [STAND-OFF-TIGHT]  113.03,61.21 0 top
H52  STAND-OFFTIGHT  [STAND-OFF-TIGHT]  159.26,81.53 0 top
H53  STAND-OFFTIGHT  [STAND-OFF-TIGHT]  138.94,81.53 0 top
H54  STAND-OFFTIGHT  [STAND-OFF-TIGHT]  138.94,61.21 0 top
H55  STAND-OFFTIGHT  [STAND-OFF-TIGHT]  29.72,107.44 0 top
H56  STAND-OFFTIGHT  [STAND-OFF-TIGHT]  9.4,107.44 0 top
H57  STAND-OFFTIGHT  [STAND-OFF-TIGHT]  9.4,87.12 0 top
H58  STAND-OFFTIGHT  [STAND-OFF-TIGHT]  55.63,107.44 0 top
H59  STAND-OFFTIGHT  [STAND-OFF-TIGHT]  35.31,107.44 0 top
H60  STAND-OFFTIGHT  [STAND-OFF-TIGHT]  35.31,87.12 0 top
H61  STAND-OFFTIGHT  [STAND-OFF-TIGHT]  81.53,107.44 0 top
H62  STAND-OFFTIGHT  [STAND-OFF-TIGHT]  61.21,107.44 0 top
H63  STAND-OFFTIGHT  [STAND-OFF-TIGHT]  61.21,87.12 0 top
H64  STAND-OFFTIGHT  [STAND-OFF-TIGHT]  107.44,107.44 0 top
H65  STAND-OFFTIGHT  [STAND-OFF-TIGHT]  87.12,107.44 0 top
H66  STAND-OFFTIGHT  [STAND-OFF-TIGHT]  87.12,87.12 0 top
H67  STAND-OFFTIGHT  [STAND-OFF-TIGHT]  133.35,107.44 0 top
H68  STAND-OFFTIGHT  [STAND-OFF-TIGHT]  113.03,107.44 0 top
H69  STAND-OFFTIGHT  [STAND-OFF-TIGHT]  113.03,87.12 0 top
H70  STAND-OFFTIGHT  [STAND-OFF-TIGHT]  159.26,107.44 0 top
H71  STAND-OFFTIGHT  [STAND-OFF-TIGHT]  138.94,107.44 0 top
H72  STAND-OFFTIGHT  [STAND-OFF-TIGHT]  138.94,87.12 0 top
I2C  I2C_PU  [SMT-JUMPER_3_2-NC_TRACE_SILK]  19.56,14.48 0 bottom
I2C1  I2C_PU  [SMT-JUMPER_3_2-NC_TRACE_SILK]  45.47,14.48 0 bottom
I2C2  I2C_PU  [SMT-JUMPER_3_2-NC_TRACE_SILK]  71.37,14.48 0 bottom
I2C3  I2C_PU  [SMT-JUMPER_3_2-NC_TRACE_SILK]  97.28,14.48 0 bottom
I2C4  I2C_PU  [SMT-JUMPER_3_2-NC_TRACE_SILK]  123.19,14.48 0 bottom
I2C5  I2C_PU  [SMT-JUMPER_3_2-NC_TRACE_SILK]  149.1,14.48 0 bottom
I2C6  I2C_PU  [SMT-JUMPER_3_2-NC_TRACE_SILK]  19.56,40.39 0 bottom
I2C7  I2C_PU  [SMT-JUMPER_3_2-NC_TRACE_SILK]  45.47,40.39 0 bottom
I2C8  I2C_PU  [SMT-JUMPER_3_2-NC_TRACE_SILK]  71.37,40.39 0 bottom
I2C9  I2C_PU  [SMT-JUMPER_3_2-NC_TRACE_SILK]  97.28,40.39 0 bottom
I2C10  I2C_PU  [SMT-JUMPER_3_2-NC_TRACE_SILK]  123.19,40.39 0 bottom
I2C11  I2C_PU  [SMT-JUMPER_3_2-NC_TRACE_SILK]  149.1,40.39 0 bottom
I2C12  I2C_PU  [SMT-JUMPER_3_2-NC_TRACE_SILK]  19.56,66.29 0 bottom
I2C13  I2C_PU  [SMT-JUMPER_3_2-NC_TRACE_SILK]  45.47,66.29 0 bottom
I2C14  I2C_PU  [SMT-JUMPER_3_2-NC_TRACE_SILK]  71.37,66.29 0 bottom
I2C15  I2C_PU  [SMT-JUMPER_3_2-NC_TRACE_SILK]  97.28,66.29 0 bottom
I2C16  I2C_PU  [SMT-JUMPER_3_2-NC_TRACE_SILK]  123.19,66.29 0 bottom
I2C17  I2C_PU  [SMT-JUMPER_3_2-NC_TRACE_SILK]  149.1,66.29 0 bottom
I2C18  I2C_PU  [SMT-JUMPER_3_2-NC_TRACE_SILK]  19.56,92.2 0 bottom
I2C19  I2C_PU  [SMT-JUMPER_3_2-NC_TRACE_SILK]  45.47,92.2 0 bottom
I2C20  I2C_PU  [SMT-JUMPER_3_2-NC_TRACE_SILK]  71.37,92.2 0 bottom
I2C21  I2C_PU  [SMT-JUMPER_3_2-NC_TRACE_SILK]  97.28,92.2 0 bottom
I2C22  I2C_PU  [SMT-JUMPER_3_2-NC_TRACE_SILK]  123.19,92.2 0 bottom
I2C23  I2C_PU  [SMT-JUMPER_3_2-NC_TRACE_SILK]  149.1,92.2 0 bottom
J1  [1X04_NO_SILK]  30.99,8.13 180 top
J2  QWIIC_RIGHT_ANGLE  [JST04_1MM_RA]  53.09,19.56 90 top
J3  QWIIC_RIGHT_ANGLE  [JST04_1MM_RA]  37.85,19.56 270 top
J4  QWIIC_RIGHT_ANGLE  [JST04_1MM_RA]  27.18,19.56 90 top
J5  QWIIC_RIGHT_ANGLE  [JST04_1MM_RA]  11.94,19.56 270 top
J6  [1X04_NO_SILK]  13.21,8.13 0 top
J7  [1X04_NO_SILK]  39.12,8.13 0 top
J8  [1X04_NO_SILK]  56.9,8.13 180 top
J9  QWIIC_RIGHT_ANGLE  [JST04_1MM_RA]  78.99,19.56 90 top
J10  QWIIC_RIGHT_ANGLE  [JST04_1MM_RA]  63.75,19.56 270 top
J11  [1X04_NO_SILK]  65.02,8.13 0 top
J12  [1X04_NO_SILK]  82.8,8.13 180 top
J13  QWIIC_RIGHT_ANGLE  [JST04_1MM_RA]  104.9,19.56 90 top
J14  QWIIC_RIGHT_ANGLE  [JST04_1MM_RA]  89.66,19.56 270 top
J15  [1X04_NO_SILK]  90.93,8.13 0 top
J16  [1X04_NO_SILK]  108.71,8.13 180 top
J17  QWIIC_RIGHT_ANGLE  [JST04_1MM_RA]  130.81,19.56 90 top
J18  QWIIC_RIGHT_ANGLE  [JST04_1MM_RA]  115.57,19.56 270 top
J19  [1X04_NO_SILK]  116.84,8.13 0 top
J20  [1X04_NO_SILK]  134.62,8.13 180 top
J21  QWIIC_RIGHT_ANGLE  [JST04_1MM_RA]  156.72,19.56 90 top
J22  QWIIC_RIGHT_ANGLE  [JST04_1MM_RA]  141.48,19.56 270 top
J23  [1X04_NO_SILK]  142.75,8.13 0 top
J24  [1X04_NO_SILK]  160.53,8.13 180 top
J25  QWIIC_RIGHT_ANGLE  [JST04_1MM_RA]  27.18,45.47 90 top
J26  QWIIC_RIGHT_ANGLE  [JST04_1MM_RA]  11.94,45.47 270 top
J27  [1X04_NO_SILK]  13.21,34.04 0 top
J28  [1X04_NO_SILK]  30.99,34.04 180 top
J29  QWIIC_RIGHT_ANGLE  [JST04_1MM_RA]  53.09,45.47 90 top
J30  QWIIC_RIGHT_ANGLE  [JST04_1MM_RA]  37.85,45.47 270 top
J31  [1X04_NO_SILK]  39.12,34.04 0 top
J32  [1X04_NO_SILK]  56.9,34.04 180 top
J33  QWIIC_RIGHT_ANGLE  [JST04_1MM_RA]  78.99,45.47 90 top
J34  QWIIC_RIGHT_ANGLE  [JST04_1MM_RA]  63.75,45.47 270 top
J35  [1X04_NO_SILK]  65.02,34.04 0 top
J36  [1X04_NO_SILK]  82.8,34.04 180 top
J37  QWIIC_RIGHT_ANGLE  [JST04_1MM_RA]  104.9,45.47 90 top
J38  QWIIC_RIGHT_ANGLE  [JST04_1MM_RA]  89.66,45.47 270 top
J39  [1X04_NO_SILK]  90.93,34.04 0 top
J40  [1X04_NO_SILK]  108.71,34.04 180 top
J41  QWIIC_RIGHT_ANGLE  [JST04_1MM_RA]  130.81,45.47 90 top
J42  QWIIC_RIGHT_ANGLE  [JST04_1MM_RA]  115.57,45.47 270 top
J43  [1X04_NO_SILK]  116.84,34.04 0 top
J44  [1X04_NO_SILK]  134.62,34.04 180 top
J45  QWIIC_RIGHT_ANGLE  [JST04_1MM_RA]  156.72,45.47 90 top
J46  QWIIC_RIGHT_ANGLE  [JST04_1MM_RA]  141.48,45.47 270 top
J47  [1X04_NO_SILK]  142.75,34.04 0 top
J48  [1X04_NO_SILK]  160.53,34.04 180 top
J49  QWIIC_RIGHT_ANGLE  [JST04_1MM_RA]  27.18,71.37 90 top
J50  QWIIC_RIGHT_ANGLE  [JST04_1MM_RA]  11.94,71.37 270 top
J51  [1X04_NO_SILK]  13.21,59.94 0 top
J52  [1X04_NO_SILK]  30.99,59.94 180 top
J53  QWIIC_RIGHT_ANGLE  [JST04_1MM_RA]  53.09,71.37 90 top
J54  QWIIC_RIGHT_ANGLE  [JST04_1MM_RA]  37.85,71.37 270 top
J55  [1X04_NO_SILK]  39.12,59.94 0 top
J56  [1X04_NO_SILK]  56.9,59.94 180 top
J57  QWIIC_RIGHT_ANGLE  [JST04_1MM_RA]  78.99,71.37 90 top
J58  QWIIC_RIGHT_ANGLE  [JST04_1MM_RA]  63.75,71.37 270 top
J59  [1X04_NO_SILK]  65.02,59.94 0 top
J60  [1X04_NO_SILK]  82.8,59.94 180 top
J61  QWIIC_RIGHT_ANGLE  [JST04_1MM_RA]  104.9,71.37 90 top
J62  QWIIC_RIGHT_ANGLE  [JST04_1MM_RA]  89.66,71.37 270 top
J63  [1X04_NO_SILK]  90.93,59.94 0 top
J64  [1X04_NO_SILK]  108.71,59.94 180 top
J65  QWIIC_RIGHT_ANGLE  [JST04_1MM_RA]  130.81,71.37 90 top
J66  QWIIC_RIGHT_ANGLE  [JST04_1MM_RA]  115.57,71.37 270 top
J67  [1X04_NO_SILK]  116.84,59.94 0 top
J68  [1X04_NO_SILK]  134.62,59.94 180 top
J69  QWIIC_RIGHT_ANGLE  [JST04_1MM_RA]  156.72,71.37 90 top
J70  QWIIC_RIGHT_ANGLE  [JST04_1MM_RA]  141.48,71.37 270 top
J71  [1X04_NO_SILK]  142.75,59.94 0 top
J72  [1X04_NO_SILK]  160.53,59.94 180 top
J73  QWIIC_RIGHT_ANGLE  [JST04_1MM_RA]  27.18,97.28 90 top
J74  QWIIC_RIGHT_ANGLE  [JST04_1MM_RA]  11.94,97.28 270 top
J75  [1X04_NO_SILK]  13.21,85.85 0 top
J76  [1X04_NO_SILK]  30.99,85.85 180 top
J77  QWIIC_RIGHT_ANGLE  [JST04_1MM_RA]  53.09,97.28 90 top
J78  QWIIC_RIGHT_ANGLE  [JST04_1MM_RA]  37.85,97.28 270 top
J79  [1X04_NO_SILK]  39.12,85.85 0 top
J80  [1X04_NO_SILK]  56.9,85.85 180 top
J81  QWIIC_RIGHT_ANGLE  [JST04_1MM_RA]  78.99,97.28 90 top
J82  QWIIC_RIGHT_ANGLE  [JST04_1MM_RA]  63.75,97.28 270 top
J83  [1X04_NO_SILK]  65.02,85.85 0 top
J84  [1X04_NO_SILK]  82.8,85.85 180 top
J85  QWIIC_RIGHT_ANGLE  [JST04_1MM_RA]  104.9,97.28 90 top
J86  QWIIC_RIGHT_ANGLE  [JST04_1MM_RA]  89.66,97.28 270 top
J87  [1X04_NO_SILK]  90.93,85.85 0 top
J88  [1X04_NO_SILK]  108.71,85.85 180 top
J89  QWIIC_RIGHT_ANGLE  [JST04_1MM_RA]  130.81,97.28 90 top
J90  QWIIC_RIGHT_ANGLE  [JST04_1MM_RA]  115.57,97.28 270 top
J91  [1X04_NO_SILK]  116.84,85.85 0 top
J92  [1X04_NO_SILK]  134.62,85.85 180 top
J93  QWIIC_RIGHT_ANGLE  [JST04_1MM_RA]  156.72,97.28 90 top
J94  QWIIC_RIGHT_ANGLE  [JST04_1MM_RA]  141.48,97.28 270 top
J95  [1X04_NO_SILK]  142.75,85.85 0 top
J96  [1X04_NO_SILK]  160.53,85.85 180 top
LED  LED  [SMT-JUMPER_2_NC_TRACE_SILK]  9.4,23.37 0 bottom
LED1  LED  [SMT-JUMPER_2_NC_TRACE_SILK]  35.31,23.37 0 bottom
LED2  LED  [SMT-JUMPER_2_NC_TRACE_SILK]  61.21,23.37 0 bottom
LED3  LED  [SMT-JUMPER_2_NC_TRACE_SILK]  87.12,23.37 0 bottom
LED4  LED  [SMT-JUMPER_2_NC_TRACE_SILK]  113.03,23.37 0 bottom
LED5  LED  [SMT-JUMPER_2_NC_TRACE_SILK]  138.94,23.37 0 bottom
LED6  LED  [SMT-JUMPER_2_NC_TRACE_SILK]  9.4,49.28 0 bottom
LED7  LED  [SMT-JUMPER_2_NC_TRACE_SILK]  35.31,49.28 0 bottom
LED8  LED  [SMT-JUMPER_2_NC_TRACE_SILK]  61.21,49.28 0 bottom
LED9  LED  [SMT-JUMPER_2_NC_TRACE_SILK]  87.12,49.28 0 bottom
LED10  LED  [SMT-JUMPER_2_NC_TRACE_SILK]  113.03,49.28 0 bottom
LED11  LED  [SMT-JUMPER_2_NC_TRACE_SILK]  138.94,49.28 0 bottom
LED12  LED  [SMT-JUMPER_2_NC_TRACE_SILK]  9.4,75.18 0 bottom
LED13  LED  [SMT-JUMPER_2_NC_TRACE_SILK]  35.31,75.18 0 bottom
LED14  LED  [SMT-JUMPER_2_NC_TRACE_SILK]  61.21,75.18 0 bottom
LED15  LED  [SMT-JUMPER_2_NC_TRACE_SILK]  87.12,75.18 0 bottom
LED16  LED  [SMT-JUMPER_2_NC_TRACE_SILK]  113.03,75.18 0 bottom
LED17  LED  [SMT-JUMPER_2_NC_TRACE_SILK]  138.94,75.18 0 bottom
LED18  LED  [SMT-JUMPER_2_NC_TRACE_SILK]  9.4,101.09 0 bottom
LED19  LED  [SMT-JUMPER_2_NC_TRACE_SILK]  35.31,101.09 0 bottom
LED20  LED  [SMT-JUMPER_2_NC_TRACE_SILK]  61.21,101.09 0 bottom
LED21  LED  [SMT-JUMPER_2_NC_TRACE_SILK]  87.12,101.09 0 bottom
LED22  LED  [SMT-JUMPER_2_NC_TRACE_SILK]  113.03,101.09 0 bottom
LED23  LED  [SMT-JUMPER_2_NC_TRACE_SILK]  138.94,101.09 0 bottom
LOGO1  SFE_LOGO_NAME_FLAME.1_INCH  [SFE_LOGO_NAME_FLAME_.1]  45.47,28.19 0 bottom
LOGO2  OSHW-LOGOS  [OSHW-LOGO-S]  35.05,12.83 0 bottom
LOGO3  SFE_LOGO_NAME_FLAME.1_INCH  [SFE_LOGO_NAME_FLAME_.1]  19.56,28.19 0 bottom
LOGO4  OSHW-LOGOS  [OSHW-LOGO-S]  9.14,12.83 0 bottom
LOGO5  SFE_LOGO_NAME_FLAME.1_INCH  [SFE_LOGO_NAME_FLAME_.1]  71.37,28.19 0 bottom
LOGO6  OSHW-LOGOS  [OSHW-LOGO-S]  60.96,12.83 0 bottom
LOGO7  SFE_LOGO_NAME_FLAME.1_INCH  [SFE_LOGO_NAME_FLAME_.1]  97.28,28.19 0 bottom
LOGO8  OSHW-LOGOS  [OSHW-LOGO-S]  86.87,12.83 0 bottom
LOGO9  SFE_LOGO_NAME_FLAME.1_INCH  [SFE_LOGO_NAME_FLAME_.1]  123.19,28.19 0 bottom
LOGO10  OSHW-LOGOS  [OSHW-LOGO-S]  112.78,12.83 0 bottom
LOGO11  SFE_LOGO_NAME_FLAME.1_INCH  [SFE_LOGO_NAME_FLAME_.1]  149.1,28.19 0 bottom
LOGO12  OSHW-LOGOS  [OSHW-LOGO-S]  138.68,12.83 0 bottom
LOGO13  SFE_LOGO_NAME_FLAME.1_INCH  [SFE_LOGO_NAME_FLAME_.1]  19.56,54.1 0 bottom
LOGO14  OSHW-LOGOS  [OSHW-LOGO-S]  9.14,38.73 0 bottom
LOGO15  SFE_LOGO_NAME_FLAME.1_INCH  [SFE_LOGO_NAME_FLAME_.1]  45.47,54.1 0 bottom
LOGO16  OSHW-LOGOS  [OSHW-LOGO-S]  35.05,38.73 0 bottom
LOGO17  SFE_LOGO_NAME_FLAME.1_INCH  [SFE_LOGO_NAME_FLAME_.1]  71.37,54.1 0 bottom
LOGO18  OSHW-LOGOS  [OSHW-LOGO-S]  60.96,38.73 0 bottom
LOGO19  SFE_LOGO_NAME_FLAME.1_INCH  [SFE_LOGO_NAME_FLAME_.1]  97.28,54.1 0 bottom
LOGO20  OSHW-LOGOS  [OSHW-LOGO-S]  86.87,38.73 0 bottom
LOGO21  SFE_LOGO_NAME_FLAME.1_INCH  [SFE_LOGO_NAME_FLAME_.1]  123.19,54.1 0 bottom
LOGO22  OSHW-LOGOS  [OSHW-LOGO-S]  112.78,38.73 0 bottom
LOGO23  SFE_LOGO_NAME_FLAME.1_INCH  [SFE_LOGO_NAME_FLAME_.1]  149.1,54.1 0 bottom
LOGO24  OSHW-LOGOS  [OSHW-LOGO-S]  138.68,38.73 0 bottom
LOGO25  SFE_LOGO_NAME_FLAME.1_INCH  [SFE_LOGO_NAME_FLAME_.1]  19.56,80.01 0 bottom
LOGO26  OSHW-LOGOS  [OSHW-LOGO-S]  9.14,64.64 0 bottom
LOGO27  SFE_LOGO_NAME_FLAME.1_INCH  [SFE_LOGO_NAME_FLAME_.1]  45.47,80.01 0 bottom
LOGO28  OSHW-LOGOS  [OSHW-LOGO-S]  35.05,64.64 0 bottom
LOGO29  SFE_LOGO_NAME_FLAME.1_INCH  [SFE_LOGO_NAME_FLAME_.1]  71.37,80.01 0 bottom
LOGO30  OSHW-LOGOS  [OSHW-LOGO-S]  60.96,64.64 0 bottom
LOGO31  SFE_LOGO_NAME_FLAME.1_INCH  [SFE_LOGO_NAME_FLAME_.1]  97.28,80.01 0 bottom
LOGO32  OSHW-LOGOS  [OSHW-LOGO-S]  86.87,64.64 0 bottom
LOGO33  SFE_LOGO_NAME_FLAME.1_INCH  [SFE_LOGO_NAME_FLAME_.1]  123.19,80.01 0 bottom
LOGO34  OSHW-LOGOS  [OSHW-LOGO-S]  112.78,64.64 0 bottom
LOGO35  SFE_LOGO_NAME_FLAME.1_INCH  [SFE_LOGO_NAME_FLAME_.1]  149.1,80.01 0 bottom
LOGO36  OSHW-LOGOS  [OSHW-LOGO-S]  138.68,64.64 0 bottom
LOGO37  SFE_LOGO_NAME_FLAME.1_INCH  [SFE_LOGO_NAME_FLAME_.1]  19.56,105.92 0 bottom
LOGO38  OSHW-LOGOS  [OSHW-LOGO-S]  9.14,90.55 0 bottom
LOGO39  SFE_LOGO_NAME_FLAME.1_INCH  [SFE_LOGO_NAME_FLAME_.1]  45.47,105.92 0 bottom
LOGO40  OSHW-LOGOS  [OSHW-LOGO-S]  35.05,90.55 0 bottom
LOGO41  SFE_LOGO_NAME_FLAME.1_INCH  [SFE_LOGO_NAME_FLAME_.1]  71.37,105.92 0 bottom
LOGO42  OSHW-LOGOS  [OSHW-LOGO-S]  60.96,90.55 0 bottom
LOGO43  SFE_LOGO_NAME_FLAME.1_INCH  [SFE_LOGO_NAME_FLAME_.1]  97.28,105.92 0 bottom
LOGO44  OSHW-LOGOS  [OSHW-LOGO-S]  86.87,90.55 0 bottom
LOGO45  SFE_LOGO_NAME_FLAME.1_INCH  [SFE_LOGO_NAME_FLAME_.1]  123.19,105.92 0 bottom
LOGO46  OSHW-LOGOS  [OSHW-LOGO-S]  112.78,90.55 0 bottom
LOGO47  SFE_LOGO_NAME_FLAME.1_INCH  [SFE_LOGO_NAME_FLAME_.1]  149.1,105.92 0 bottom
LOGO48  OSHW-LOGOS  [OSHW-LOGO-S]  138.68,90.55 0 bottom
R1  10k  [0603]  15.11,14.48 270 top
R2  10k  [0603]  24.51,14.48 270 top
R3  2.2k  [0603]  18.16,14.48 90 top
R4  2.2k  [0603]  44.07,14.48 90 top
R5  2.2k  [0603]  20.78,14.48 90 top
R6  1k  [0603]  9.78,25.22 270 top
R7  2.2k  [0603]  46.69,14.48 90 top
R8  1k  [0603]  35.69,25.22 270 top
R9  10k  [0603]  41.02,14.48 270 top
R10  10k  [0603]  50.42,14.48 270 top
R11  2.2k  [0603]  69.98,14.48 90 top
R12  2.2k  [0603]  72.59,14.48 90 top
R13  1k  [0603]  61.59,25.22 270 top
R14  10k  [0603]  66.93,14.48 270 top
R15  10k  [0603]  76.33,14.48 270 top
R16  2.2k  [0603]  95.89,14.48 90 top
R17  2.2k  [0603]  98.5,14.48 90 top
R18  1k  [0603]  87.5,25.22 270 top
R19  10k  [0603]  92.84,14.48 270 top
R20  10k  [0603]  102.23,14.48 270 top
R21  2.2k  [0603]  121.79,14.48 90 top
R22  2.2k  [0603]  124.41,14.48 90 top
R23  1k  [0603]  113.41,25.22 270 top
R24  10k  [0603]  118.75,14.48 270 top
R25  10k  [0603]  128.14,14.48 270 top
R26  2.2k  [0603]  147.7,14.48 90 top
R27  2.2k  [0603]  150.32,14.48 90 top
R28  1k  [0603]  139.32,25.22 270 top
R29  10k  [0603]  144.65,14.48 270 top
R30  10k  [0603]  154.05,14.48 270 top
R31  2.2k  [0603]  18.16,40.39 90 top
R32  2.2k  [0603]  20.78,40.39 90 top
R33  1k  [0603]  9.78,51.13 270 top
R34  10k  [0603]  15.11,40.39 270 top
R35  10k  [0603]  24.51,40.39 270 top
R36  2.2k  [0603]  44.07,40.39 90 top
R37  2.2k  [0603]  46.69,40.39 90 top
R38  1k  [0603]  35.69,51.13 270 top
R39  10k  [0603]  41.02,40.39 270 top
R40  10k  [0603]  50.42,40.39 270 top
R41  2.2k  [0603]  69.98,40.39 90 top
R42  2.2k  [0603]  72.59,40.39 90 top
R43  1k  [0603]  61.59,51.13 270 top
R44  10k  [0603]  66.93,40.39 270 top
R45  10k  [0603]  76.33,40.39 270 top
R46  2.2k  [0603]  95.89,40.39 90 top
R47  2.2k  [0603]  98.5,40.39 90 top
R48  1k  [0603]  87.5,51.13 270 top
R49  10k  [0603]  92.84,40.39 270 top
R50  10k  [0603]  102.23,40.39 270 top
R51  2.2k  [0603]  121.79,40.39 90 top
R52  2.2k  [0603]  124.41,40.39 90 top
R53  1k  [0603]  113.41,51.13 270 top
R54  10k  [0603]  118.75,40.39 270 top
R55  10k  [0603]  128.14,40.39 270 top
R56  2.2k  [0603]  147.7,40.39 90 top
R57  2.2k  [0603]  150.32,40.39 90 top
R58  1k  [0603]  139.32,51.13 270 top
R59  10k  [0603]  144.65,40.39 270 top
R60  10k  [0603]  154.05,40.39 270 top
R61  2.2k  [0603]  18.16,66.29 90 top
R62  2.2k  [0603]  20.78,66.29 90 top
R63  1k  [0603]  9.78,77.04 270 top
R64  10k  [0603]  15.11,66.29 270 top
R65  10k  [0603]  24.51,66.29 270 top
R66  2.2k  [0603]  44.07,66.29 90 top
R67  2.2k  [0603]  46.69,66.29 90 top
R68  1k  [0603]  35.69,77.04 270 top
R69  10k  [0603]  41.02,66.29 270 top
R70  10k  [0603]  50.42,66.29 270 top
R71  2.2k  [0603]  69.98,66.29 90 top
R72  2.2k  [0603]  72.59,66.29 90 top
R73  1k  [0603]  61.59,77.04 270 top
R74  10k  [0603]  66.93,66.29 270 top
R75  10k  [0603]  76.33,66.29 270 top
R76  2.2k  [0603]  95.89,66.29 90 top
R77  2.2k  [0603]  98.5,66.29 90 top
R78  1k  [0603]  87.5,77.04 270 top
R79  10k  [0603]  92.84,66.29 270 top
R80  10k  [0603]  102.23,66.29 270 top
R81  2.2k  [0603]  121.79,66.29 90 top
R82  2.2k  [0603]  124.41,66.29 90 top
R83  1k  [0603]  113.41,77.04 270 top
R84  10k  [0603]  118.75,66.29 270 top
R85  10k  [0603]  128.14,66.29 270 top
R86  2.2k  [0603]  147.7,66.29 90 top
R87  2.2k  [0603]  150.32,66.29 90 top
R88  1k  [0603]  139.32,77.04 270 top
R89  10k  [0603]  144.65,66.29 270 top
R90  10k  [0603]  154.05,66.29 270 top
R91  2.2k  [0603]  18.16,92.2 90 top
R92  2.2k  [0603]  20.78,92.2 90 top
R93  1k  [0603]  9.78,102.95 270 top
R94  10k  [0603]  15.11,92.2 270 top
R95  10k  [0603]  24.51,92.2 270 top
R96  2.2k  [0603]  44.07,92.2 90 top
R97  2.2k  [0603]  46.69,92.2 90 top
R98  1k  [0603]  35.69,102.95 270 top
R99  10k  [0603]  41.02,92.2 270 top
R100  10k  [0603]  50.42,92.2 270 top
R101  2.2k  [0603]  69.98,92.2 90 top
R102  2.2k  [0603]  72.59,92.2 90 top
R103  1k  [0603]  61.59,102.95 270 top
R104  10k  [0603]  66.93,92.2 270 top
R105  10k  [0603]  76.33,92.2 270 top
R106  2.2k  [0603]  95.89,92.2 90 top
R107  2.2k  [0603]  98.5,92.2 90 top
R108  1k  [0603]  87.5,102.95 270 top
R109  10k  [0603]  92.84,92.2 270 top
R110  10k  [0603]  102.23,92.2 270 top
R111  2.2k  [0603]  121.79,92.2 90 top
R112  2.2k  [0603]  124.41,92.2 90 top
R113  1k  [0603]  113.41,102.95 270 top
R114  10k  [0603]  118.75,92.2 270 top
R115  10k  [0603]  128.14,92.2 270 top
R116  2.2k  [0603]  147.7,92.2 90 top
R117  2.2k  [0603]  150.32,92.2 90 top
R118  1k  [0603]  139.32,102.95 270 top
R119  10k  [0603]  144.65,92.2 270 top
R120  10k  [0603]  154.05,92.2 270 top
U$1  TMF882X_TMF8820  [TMF882X]  19.56,19.56 0 top
U$2  [#3V3#0]  15.75,10.79 90 top
U$3  [#GND#4]  13.21,10.79 90 top
U$4  [#SDA#6]  18.29,10.79 90 top
U$5  [#SCL#5]  20.83,10.67 90 top
U$6  QWIIC_LOGO_5MM  [QWIIC_5MM]  9.52,15.11 0 top
U$7  [#EN#7]  30.99,10.29 270 bottom
U$8  [#GP0#19]  25.91,10.67 90 top
U$9  [#GP1#8]  28.45,10.54 90 top
U$10  [##INT##9]  23.37,10.54 90 top
U$11  [DTOF882188211]  19.56,28.07 0 top
U$12  [TMF88209]  20.83,26.04 0 top
U$13  [SFE_LOGO_NAME_.1]  19.56,29.97 0 top
U$14  [PWR882188212]  11.3,25.15 90 top
U$15  [#SYNC#8]  25.91,11.3 270 bottom
U$16  [#3V3#0]  15.75,10.79 270 bottom
U$17  [#EN#7]  30.99,10.29 90 top
U$18  [#GND#4]  13.21,10.79 270 bottom
U$19  [#GP1#8]  28.45,10.54 270 bottom
U$20  [#I2C#11]  19.56,16.26 0 bottom
U$21  [#SCL#5]  20.83,10.67 270 bottom
U$22  [#LED#10]  12.45,23.5 0 bottom
U$23  [#SDA#6]  18.29,10.79 270 bottom
U$24  [##INT##8]  23.37,10.54 270 bottom
U$25  [TMF882188210]  20.83,23.88 0 top
U$26  [DTOF882188211]  19.56,26.54 0 bottom
U$27  [TMF882X882188211]  19.56,24.89 0 bottom
U$28  [DEF11]  22.99,18.54 0 bottom
U$29  [ADDR#12]  19.18,18.54 0 bottom
U$30  [0X4113]  15.37,18.41 0 bottom
U$31  QWIIC_LOGO_5MM  [QWIIC_5MM]  35.43,15.11 0 top
U$32  TMF882X_TMF8820  [TMF882X]  45.47,19.56 0 top
U$33  [#3V3#0]  41.66,10.79 90 top
U$34  [#GND#4]  39.12,10.79 90 top
U$35  [#SDA#6]  44.2,10.79 90 top
U$36  [#SCL#5]  46.74,10.67 90 top
U$37  [#EN#7]  56.9,10.29 270 bottom
U$38  [PWR882188212]  37.21,25.15 90 top
U$39  [#3V3#0]  41.66,10.79 270 bottom
U$40  [#EN#7]  56.9,10.29 90 top
U$41  [#GND#4]  39.12,10.79 270 bottom
U$42  [#I2C#11]  45.47,16.26 0 bottom
U$43  [#LED#10]  38.35,23.5 0 bottom
U$44  [#SCL#5]  46.74,10.67 270 bottom
U$45  [#SDA#6]  44.2,10.79 270 bottom
U$46  [DEF11]  48.89,18.54 0 bottom
U$47  [ADDR#12]  45.08,18.54 0 bottom
U$48  [0X4113]  41.27,18.41 0 bottom
U$49  [##INT##9]  49.28,10.54 90 top
U$50  [DTOF882188211]  45.47,28.07 0 top
U$51  [TMF88209]  46.74,26.04 0 top
U$52  [#SYNC#8]  51.82,11.3 270 bottom
U$53  [##INT##8]  49.28,10.54 270 bottom
U$54  [DTOF882188211]  45.47,26.54 0 bottom
U$55  [SFE_LOGO_NAME_.1]  45.47,29.97 0 top
U$56  [TMF882188210]  46.74,23.88 0 top
U$57  [TMF882X882188211]  45.47,24.89 0 bottom
U$58  [#GP0#19]  51.82,10.67 90 top
U$59  [#GP1#8]  54.36,10.54 90 top
U$60  [#GP1#8]  54.36,10.54 270 bottom
U$61  QWIIC_LOGO_5MM  [QWIIC_5MM]  61.34,15.11 0 top
U$62  TMF882X_TMF8820  [TMF882X]  71.37,19.56 0 top
U$63  [#3V3#0]  67.56,10.79 90 top
U$64  [#GND#4]  65.02,10.79 90 top
U$65  [#SDA#6]  70.1,10.79 90 top
U$66  [#SCL#5]  72.64,10.67 90 top
U$67  [#EN#7]  82.8,10.29 270 bottom
U$68  [PWR882188212]  63.12,25.15 90 top
U$69  [#3V3#0]  67.56,10.79 270 bottom
U$70  [#EN#7]  82.8,10.29 90 top
U$71  [#GND#4]  65.02,10.79 270 bottom
U$72  [#I2C#11]  71.37,16.26 0 bottom
U$73  [#LED#10]  64.26,23.5 0 bottom
U$74  [#SCL#5]  72.64,10.67 270 bottom
U$75  [#SDA#6]  70.1,10.79 270 bottom
U$76  [DEF11]  74.8,18.54 0 bottom
U$77  [ADDR#12]  70.99,18.54 0 bottom
U$78  [0X4113]  67.18,18.41 0 bottom
U$79  [##INT##9]  75.18,10.54 90 top
U$80  [DTOF882188211]  71.37,28.07 0 top
U$81  [TMF88209]  72.64,26.04 0 top
U$82  [#SYNC#8]  77.72,11.3 270 bottom
U$83  [##INT##8]  75.18,10.54 270 bottom
U$84  [DTOF882188211]  71.37,26.54 0 bottom
U$85  [SFE_LOGO_NAME_.1]  71.37,29.97 0 top
U$86  [TMF882188210]  72.64,23.88 0 top
U$87  [TMF882X882188211]  71.37,24.89 0 bottom
U$88  [#GP0#19]  77.72,10.67 90 top
U$89  [#GP1#8]  80.26,10.54 90 top
U$90  [#GP1#8]  80.26,10.54 270 bottom
U$91  QWIIC_LOGO_5MM  [QWIIC_5MM]  87.25,15.11 0 top
U$92  TMF882X_TMF8820  [TMF882X]  97.28,19.56 0 top
U$93  [#3V3#0]  93.47,10.79 90 top
U$94  [#GND#4]  90.93,10.79 90 top
U$95  [#SDA#6]  96.01,10.79 90 top
U$96  [#SCL#5]  98.55,10.67 90 top
U$97  [#EN#7]  108.71,10.29 270 bottom
U$98  [PWR882188212]  89.03,25.15 90 top
U$99  [#3V3#0]  93.47,10.79 270 bottom
U$100  [#EN#7]  108.71,10.29 90 top
U$101  [#GND#4]  90.93,10.79 270 bottom
U$102  [#I2C#11]  97.28,16.26 0 bottom
U$103  [#LED#10]  90.17,23.5 0 bottom
U$104  [#SCL#5]  98.55,10.67 270 bottom
U$105  [#SDA#6]  96.01,10.79 270 bottom
U$106  [DEF11]  100.71,18.54 0 bottom
U$107  [ADDR#12]  96.9,18.54 0 bottom
U$108  [0X4113]  93.09,18.41 0 bottom
U$109  [##INT##9]  101.09,10.54 90 top
U$110  [DTOF882188211]  97.28,28.07 0 top
U$111  [TMF88209]  98.55,26.04 0 top
U$112  [#SYNC#8]  103.63,11.3 270 bottom
U$113  [##INT##8]  101.09,10.54 270 bottom
U$114  [DTOF882188211]  97.28,26.54 0 bottom
U$115  [SFE_LOGO_NAME_.1]  97.28,29.97 0 top
U$116  [TMF882188210]  98.55,23.88 0 top
U$117  [TMF882X882188211]  97.28,24.89 0 bottom
U$118  [#GP0#19]  103.63,10.67 90 top
U$119  [#GP1#8]  106.17,10.54 90 top
U$120  [#GP1#8]  106.17,10.54 270 bottom
U$121  QWIIC_LOGO_5MM  [QWIIC_5MM]  113.16,15.11 0 top
U$122  TMF882X_TMF8820  [TMF882X]  123.19,19.56 0 top
U$123  [#3V3#0]  119.38,10.79 90 top
U$124  [#GND#4]  116.84,10.79 90 top
U$125  [#SDA#6]  121.92,10.79 90 top
U$126  [#SCL#5]  124.46,10.67 90 top
U$127  [#EN#7]  134.62,10.29 270 bottom
U$128  [PWR882188212]  114.94,25.15 90 top
U$129  [#3V3#0]  119.38,10.79 270 bottom
U$130  [#EN#7]  134.62,10.29 90 top
U$131  [#GND#4]  116.84,10.79 270 bottom
U$132  [#I2C#11]  123.19,16.26 0 bottom
U$133  [#LED#10]  116.08,23.5 0 bottom
U$134  [#SCL#5]  124.46,10.67 270 bottom
U$135  [#SDA#6]  121.92,10.79 270 bottom
U$136  [DEF11]  126.62,18.54 0 bottom
U$137  [ADDR#12]  122.81,18.54 0 bottom
U$138  [0X4113]  119,18.41 0 bottom
U$139  [##INT##9]  127,10.54 90 top
U$140  [DTOF882188211]  123.19,28.07 0 top
U$141  [TMF88209]  124.46,26.04 0 top
U$142  [#SYNC#8]  129.54,11.3 270 bottom
U$143  [##INT##8]  127,10.54 270 bottom
U$144  [DTOF882188211]  123.19,26.54 0 bottom
U$145  [SFE_LOGO_NAME_.1]  123.19,29.97 0 top
U$146  [TMF882188210]  124.46,23.88 0 top
U$147  [TMF882X882188211]  123.19,24.89 0 bottom
U$148  [#GP0#19]  129.54,10.67 90 top
U$149  [#GP1#8]  132.08,10.54 90 top
U$150  [#GP1#8]  132.08,10.54 270 bottom
U$151  QWIIC_LOGO_5MM  [QWIIC_5MM]  139.06,15.11 0 top
U$152  TMF882X_TMF8820  [TMF882X]  149.1,19.56 0 top
U$153  [#3V3#0]  145.29,10.79 90 top
U$154  [#GND#4]  142.75,10.79 90 top
U$155  [#SDA#6]  147.83,10.79 90 top
U$156  [#SCL#5]  150.37,10.67 90 top
U$157  [#EN#7]  160.53,10.29 270 bottom
U$158  [PWR882188212]  140.84,25.15 90 top
U$159  [#3V3#0]  145.29,10.79 270 bottom
U$160  [#EN#7]  160.53,10.29 90 top
U$161  [#GND#4]  142.75,10.79 270 bottom
U$162  [#I2C#11]  149.1,16.26 0 bottom
U$163  [#LED#10]  141.99,23.5 0 bottom
U$164  [#SCL#5]  150.37,10.67 270 bottom
U$165  [#SDA#6]  147.83,10.79 270 bottom
U$166  [DEF11]  152.53,18.54 0 bottom
U$167  [ADDR#12]  148.72,18.54 0 bottom
U$168  [0X4113]  144.91,18.41 0 bottom
U$169  [##INT##9]  152.91,10.54 90 top
U$170  [DTOF882188211]  149.1,28.07 0 top
U$171  [TMF88209]  150.37,26.04 0 top
U$172  [#SYNC#8]  155.45,11.3 270 bottom
U$173  [##INT##8]  152.91,10.54 270 bottom
U$174  [DTOF882188211]  149.1,26.54 0 bottom
U$175  [SFE_LOGO_NAME_.1]  149.1,29.97 0 top
U$176  [TMF882188210]  150.37,23.88 0 top
U$177  [TMF882X882188211]  149.1,24.89 0 bottom
U$178  [#GP0#19]  155.45,10.67 90 top
U$179  [#GP1#8]  157.99,10.54 90 top
U$180  [#GP1#8]  157.99,10.54 270 bottom
U$181  QWIIC_LOGO_5MM  [QWIIC_5MM]  9.52,41.02 0 top
U$182  TMF882X_TMF8820  [TMF882X]  19.56,45.47 0 top
U$183  [#3V3#0]  15.75,36.7 90 top
U$184  [#GND#4]  13.21,36.7 90 top
U$185  [#SDA#6]  18.29,36.7 90 top
U$186  [#SCL#5]  20.83,36.58 90 top
U$187  [#EN#7]  30.99,36.2 270 bottom
U$188  [PWR882188212]  11.3,51.05 90 top
U$189  [#3V3#0]  15.75,36.7 270 bottom
U$190  [#EN#7]  30.99,36.2 90 top
U$191  [#GND#4]  13.21,36.7 270 bottom
U$192  [#I2C#11]  19.56,42.16 0 bottom
U$193  [#LED#10]  12.45,49.4 0 bottom
U$194  [#SCL#5]  20.83,36.58 270 bottom
U$195  [#SDA#6]  18.29,36.7 270 bottom
U$196  [DEF11]  22.99,44.45 0 bottom
U$197  [ADDR#12]  19.18,44.45 0 bottom
U$198  [0X4113]  15.37,44.32 0 bottom
U$199  [##INT##9]  23.37,36.45 90 top
U$200  [DTOF882188211]  19.56,53.97 0 top
U$201  [TMF88209]  20.83,51.94 0 top
U$202  [#SYNC#8]  25.91,37.21 270 bottom
U$203  [##INT##8]  23.37,36.45 270 bottom
U$204  [DTOF882188211]  19.56,52.45 0 bottom
U$205  [SFE_LOGO_NAME_.1]  19.56,55.88 0 top
U$206  [TMF882188210]  20.83,49.78 0 top
U$207  [TMF882X882188211]  19.56,50.8 0 bottom
U$208  [#GP0#19]  25.91,36.58 90 top
U$209  [#GP1#8]  28.45,36.45 90 top
U$210  [#GP1#8]  28.45,36.45 270 bottom
U$211  QWIIC_LOGO_5MM  [QWIIC_5MM]  35.43,41.02 0 top
U$212  TMF882X_TMF8820  [TMF882X]  45.47,45.47 0 top
U$213  [#3V3#0]  41.66,36.7 90 top
U$214  [#GND#4]  39.12,36.7 90 top
U$215  [#SDA#6]  44.2,36.7 90 top
U$216  [#SCL#5]  46.74,36.58 90 top
U$217  [#EN#7]  56.9,36.2 270 bottom
U$218  [PWR882188212]  37.21,51.05 90 top
U$219  [#3V3#0]  41.66,36.7 270 bottom
U$220  [#EN#7]  56.9,36.2 90 top
U$221  [#GND#4]  39.12,36.7 270 bottom
U$222  [#I2C#11]  45.47,42.16 0 bottom
U$223  [#LED#10]  38.35,49.4 0 bottom
U$224  [#SCL#5]  46.74,36.58 270 bottom
U$225  [#SDA#6]  44.2,36.7 270 bottom
U$226  [DEF11]  48.89,44.45 0 bottom
U$227  [ADDR#12]  45.08,44.45 0 bottom
U$228  [0X4113]  41.27,44.32 0 bottom
U$229  [##INT##9]  49.28,36.45 90 top
U$230  [DTOF882188211]  45.47,53.97 0 top
U$231  [TMF88209]  46.74,51.94 0 top
U$232  [#SYNC#8]  51.82,37.21 270 bottom
U$233  [##INT##8]  49.28,36.45 270 bottom
U$234  [DTOF882188211]  45.47,52.45 0 bottom
U$235  [SFE_LOGO_NAME_.1]  45.47,55.88 0 top
U$236  [TMF882188210]  46.74,49.78 0 top
U$237  [TMF882X882188211]  45.47,50.8 0 bottom
U$238  [#GP0#19]  51.82,36.58 90 top
U$239  [#GP1#8]  54.36,36.45 90 top
U$240  [#GP1#8]  54.36,36.45 270 bottom
U$241  QWIIC_LOGO_5MM  [QWIIC_5MM]  61.34,41.02 0 top
U$242  TMF882X_TMF8820  [TMF882X]  71.37,45.47 0 top
U$243  [#3V3#0]  67.56,36.7 90 top
U$244  [#GND#4]  65.02,36.7 90 top
U$245  [#SDA#6]  70.1,36.7 90 top
U$246  [#SCL#5]  72.64,36.58 90 top
U$247  [#EN#7]  82.8,36.2 270 bottom
U$248  [PWR882188212]  63.12,51.05 90 top
U$249  [#3V3#0]  67.56,36.7 270 bottom
U$250  [#EN#7]  82.8,36.2 90 top
U$251  [#GND#4]  65.02,36.7 270 bottom
U$252  [#I2C#11]  71.37,42.16 0 bottom
U$253  [#LED#10]  64.26,49.4 0 bottom
U$254  [#SCL#5]  72.64,36.58 270 bottom
U$255  [#SDA#6]  70.1,36.7 270 bottom
U$256  [DEF11]  74.8,44.45 0 bottom
U$257  [ADDR#12]  70.99,44.45 0 bottom
U$258  [0X4113]  67.18,44.32 0 bottom
U$259  [##INT##9]  75.18,36.45 90 top
U$260  [DTOF882188211]  71.37,53.97 0 top
U$261  [TMF88209]  72.64,51.94 0 top
U$262  [#SYNC#8]  77.72,37.21 270 bottom
U$263  [##INT##8]  75.18,36.45 270 bottom
U$264  [DTOF882188211]  71.37,52.45 0 bottom
U$265  [SFE_LOGO_NAME_.1]  71.37,55.88 0 top
U$266  [TMF882188210]  72.64,49.78 0 top
U$267  [TMF882X882188211]  71.37,50.8 0 bottom
U$268  [#GP0#19]  77.72,36.58 90 top
U$269  [#GP1#8]  80.26,36.45 90 top
U$270  [#GP1#8]  80.26,36.45 270 bottom
U$271  QWIIC_LOGO_5MM  [QWIIC_5MM]  87.25,41.02 0 top
U$272  TMF882X_TMF8820  [TMF882X]  97.28,45.47 0 top
U$273  [#3V3#0]  93.47,36.7 90 top
U$274  [#GND#4]  90.93,36.7 90 top
U$275  [#SDA#6]  96.01,36.7 90 top
U$276  [#SCL#5]  98.55,36.58 90 top
U$277  [#EN#7]  108.71,36.2 270 bottom
U$278  [PWR882188212]  89.03,51.05 90 top
U$279  [#3V3#0]  93.47,36.7 270 bottom
U$280  [#EN#7]  108.71,36.2 90 top
U$281  [#GND#4]  90.93,36.7 270 bottom
U$282  [#I2C#11]  97.28,42.16 0 bottom
U$283  [#LED#10]  90.17,49.4 0 bottom
U$284  [#SCL#5]  98.55,36.58 270 bottom
U$285  [#SDA#6]  96.01,36.7 270 bottom
U$286  [DEF11]  100.71,44.45 0 bottom
U$287  [ADDR#12]  96.9,44.45 0 bottom
U$288  [0X4113]  93.09,44.32 0 bottom
U$289  [##INT##9]  101.09,36.45 90 top
U$290  [DTOF882188211]  97.28,53.97 0 top
U$291  [TMF88209]  98.55,51.94 0 top
U$292  [#SYNC#8]  103.63,37.21 270 bottom
U$293  [##INT##8]  101.09,36.45 270 bottom
U$294  [DTOF882188211]  97.28,52.45 0 bottom
U$295  [SFE_LOGO_NAME_.1]  97.28,55.88 0 top
U$296  [TMF882188210]  98.55,49.78 0 top
U$297  [TMF882X882188211]  97.28,50.8 0 bottom
U$298  [#GP0#19]  103.63,36.58 90 top
U$299  [#GP1#8]  106.17,36.45 90 top
U$300  [#GP1#8]  106.17,36.45 270 bottom
U$301  QWIIC_LOGO_5MM  [QWIIC_5MM]  113.16,41.02 0 top
U$302  TMF882X_TMF8820  [TMF882X]  123.19,45.47 0 top
U$303  [#3V3#0]  119.38,36.7 90 top
U$304  [#GND#4]  116.84,36.7 90 top
U$305  [#SDA#6]  121.92,36.7 90 top
U$306  [#SCL#5]  124.46,36.58 90 top
U$307  [#EN#7]  134.62,36.2 270 bottom
U$308  [PWR882188212]  114.94,51.05 90 top
U$309  [#3V3#0]  119.38,36.7 270 bottom
U$310  [#EN#7]  134.62,36.2 90 top
U$311  [#GND#4]  116.84,36.7 270 bottom
U$312  [#I2C#11]  123.19,42.16 0 bottom
U$313  [#LED#10]  116.08,49.4 0 bottom
U$314  [#SCL#5]  124.46,36.58 270 bottom
U$315  [#SDA#6]  121.92,36.7 270 bottom
U$316  [DEF11]  126.62,44.45 0 bottom
U$317  [ADDR#12]  122.81,44.45 0 bottom
U$318  [0X4113]  119,44.32 0 bottom
U$319  [##INT##9]  127,36.45 90 top
U$320  [DTOF882188211]  123.19,53.97 0 top
U$321  [TMF88209]  124.46,51.94 0 top
U$322  [#SYNC#8]  129.54,37.21 270 bottom
U$323  [##INT##8]  127,36.45 270 bottom
U$324  [DTOF882188211]  123.19,52.45 0 bottom
U$325  [SFE_LOGO_NAME_.1]  123.19,55.88 0 top
U$326  [TMF882188210]  124.46,49.78 0 top
U$327  [TMF882X882188211]  123.19,50.8 0 bottom
U$328  [#GP0#19]  129.54,36.58 90 top
U$329  [#GP1#8]  132.08,36.45 90 top
U$330  [#GP1#8]  132.08,36.45 270 bottom
U$331  QWIIC_LOGO_5MM  [QWIIC_5MM]  139.06,41.02 0 top
U$332  TMF882X_TMF8820  [TMF882X]  149.1,45.47 0 top
U$333  [#3V3#0]  145.29,36.7 90 top
U$334  [#GND#4]  142.75,36.7 90 top
U$335  [#SDA#6]  147.83,36.7 90 top
U$336  [#SCL#5]  150.37,36.58 90 top
U$337  [#EN#7]  160.53,36.2 270 bottom
U$338  [PWR882188212]  140.84,51.05 90 top
U$339  [#3V3#0]  145.29,36.7 270 bottom
U$340  [#EN#7]  160.53,36.2 90 top
U$341  [#GND#4]  142.75,36.7 270 bottom
U$342  [#I2C#11]  149.1,42.16 0 bottom
U$343  [#LED#10]  141.99,49.4 0 bottom
U$344  [#SCL#5]  150.37,36.58 270 bottom
U$345  [#SDA#6]  147.83,36.7 270 bottom
U$346  [DEF11]  152.53,44.45 0 bottom
U$347  [ADDR#12]  148.72,44.45 0 bottom
U$348  [0X4113]  144.91,44.32 0 bottom
U$349  [##INT##9]  152.91,36.45 90 top
U$350  [DTOF882188211]  149.1,53.97 0 top
U$351  [TMF88209]  150.37,51.94 0 top